# Altium PCB PUMP_MODULE_20230110.PcbDoc (part 1 of 6)
Units mm, origin at the board's own origin, x right, y up, seen from the top; angles counter-clockwise.
Board outline 260.15 x 142.01 mm, 4 copper layers (Top Layer, Mid-Layer 1, Mid-Layer 2, Bottom Layer); 422 components, 240 nets, 1746 pads, 416 vias.
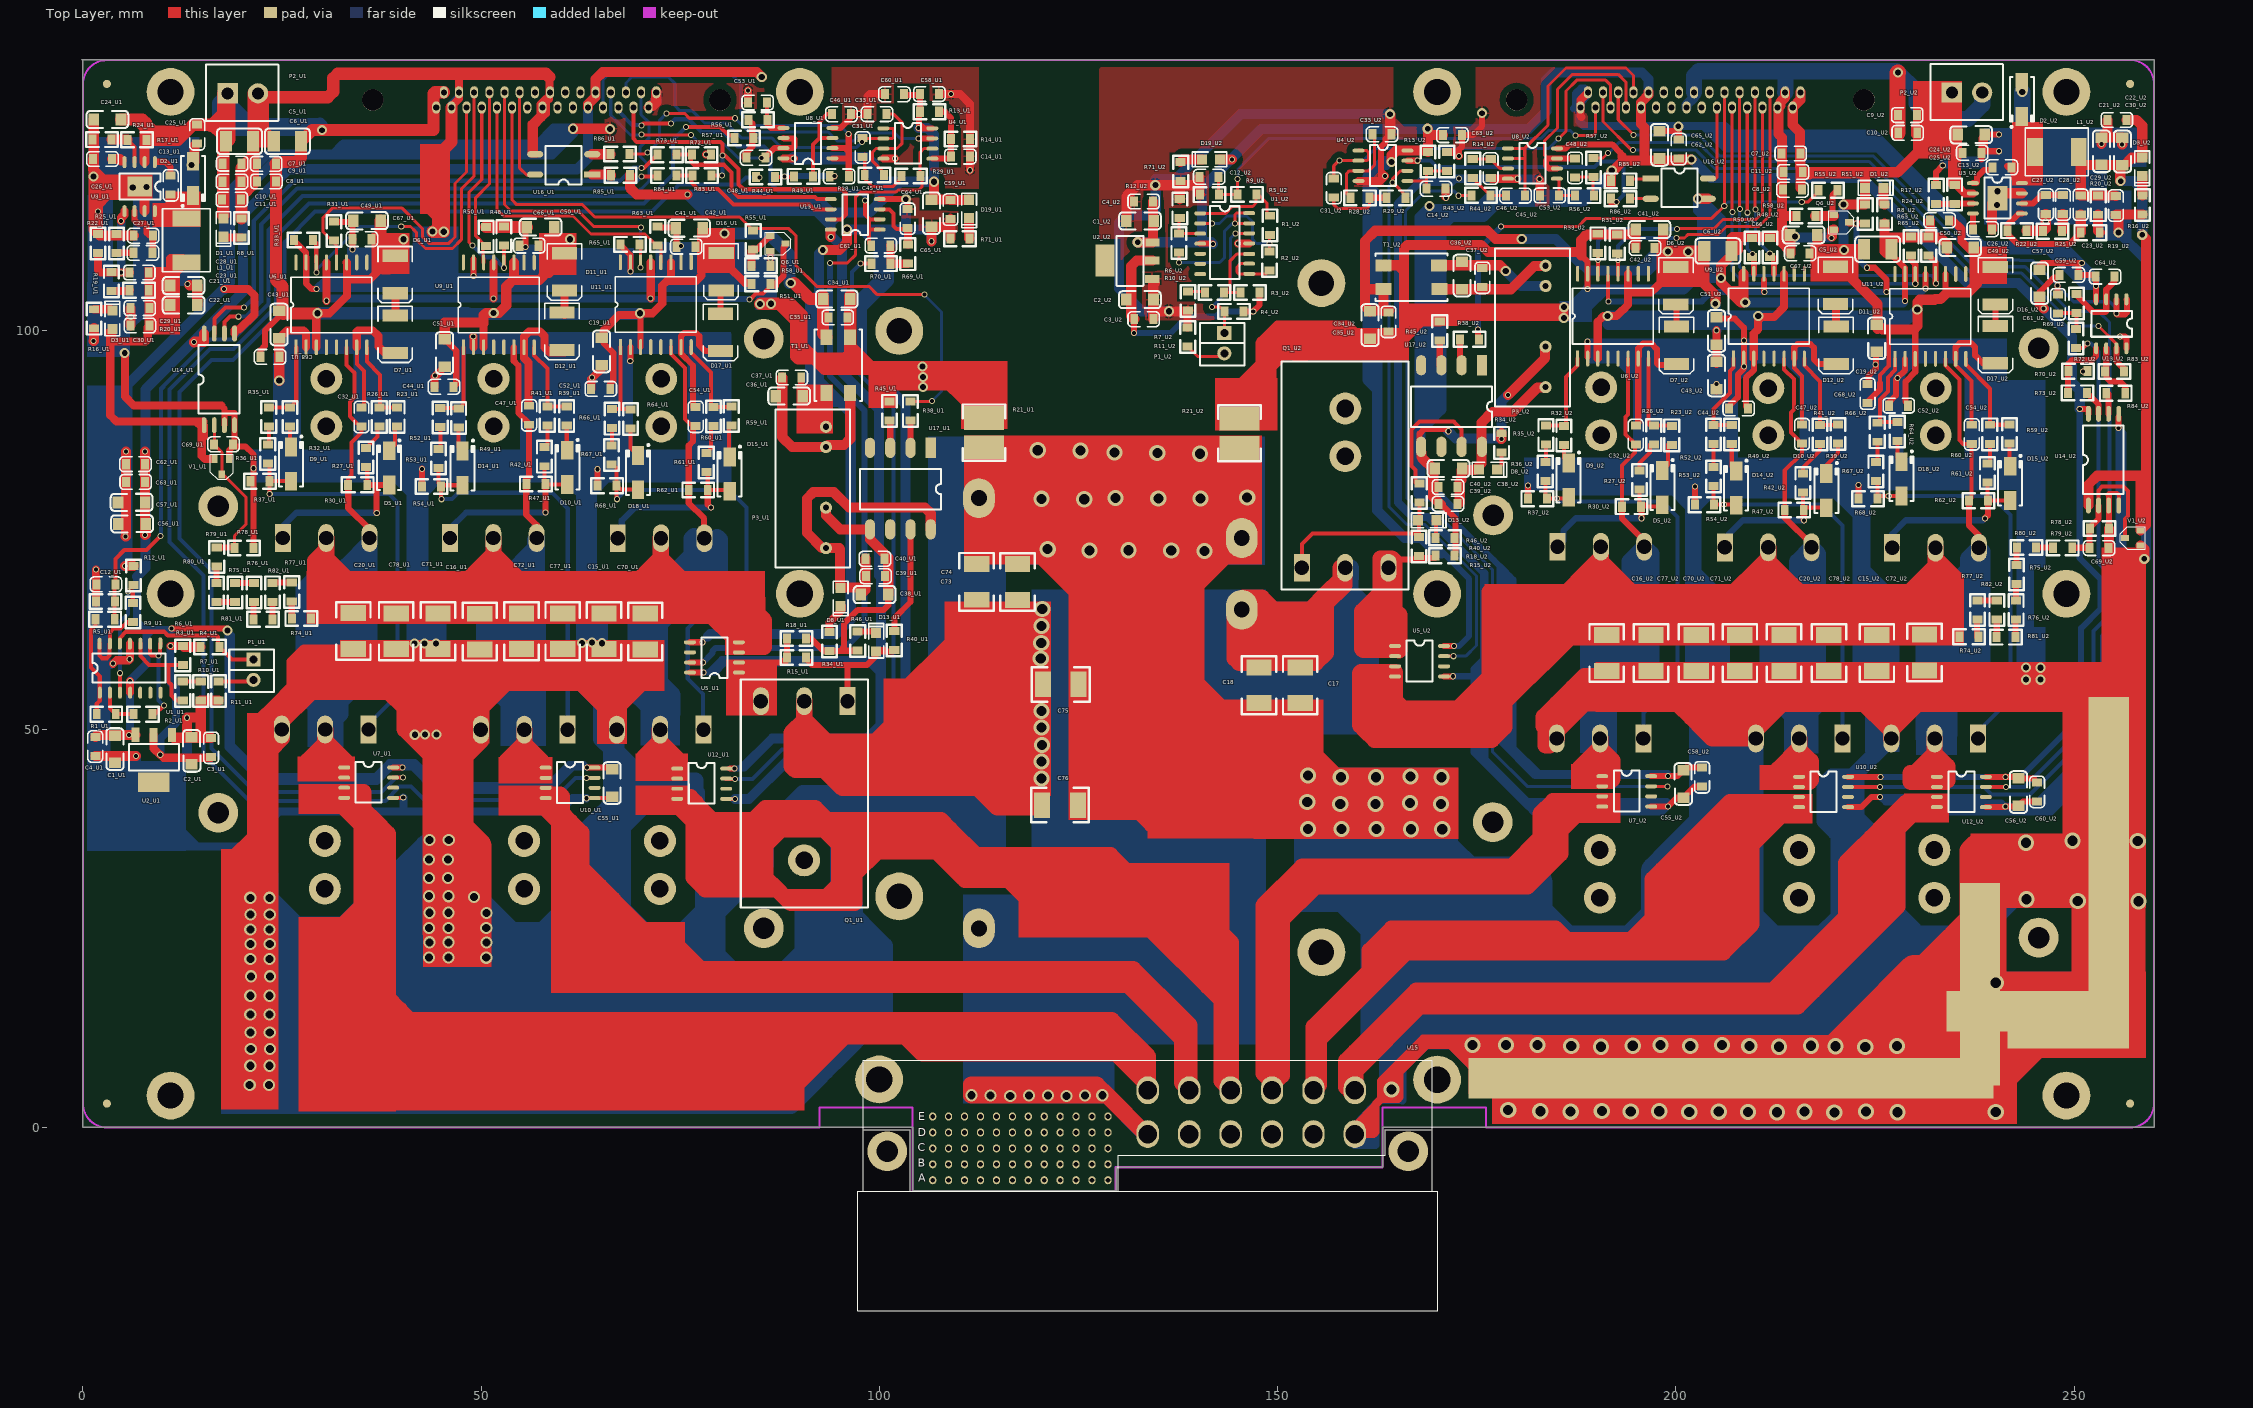
[diagram p0: Top Layer view]
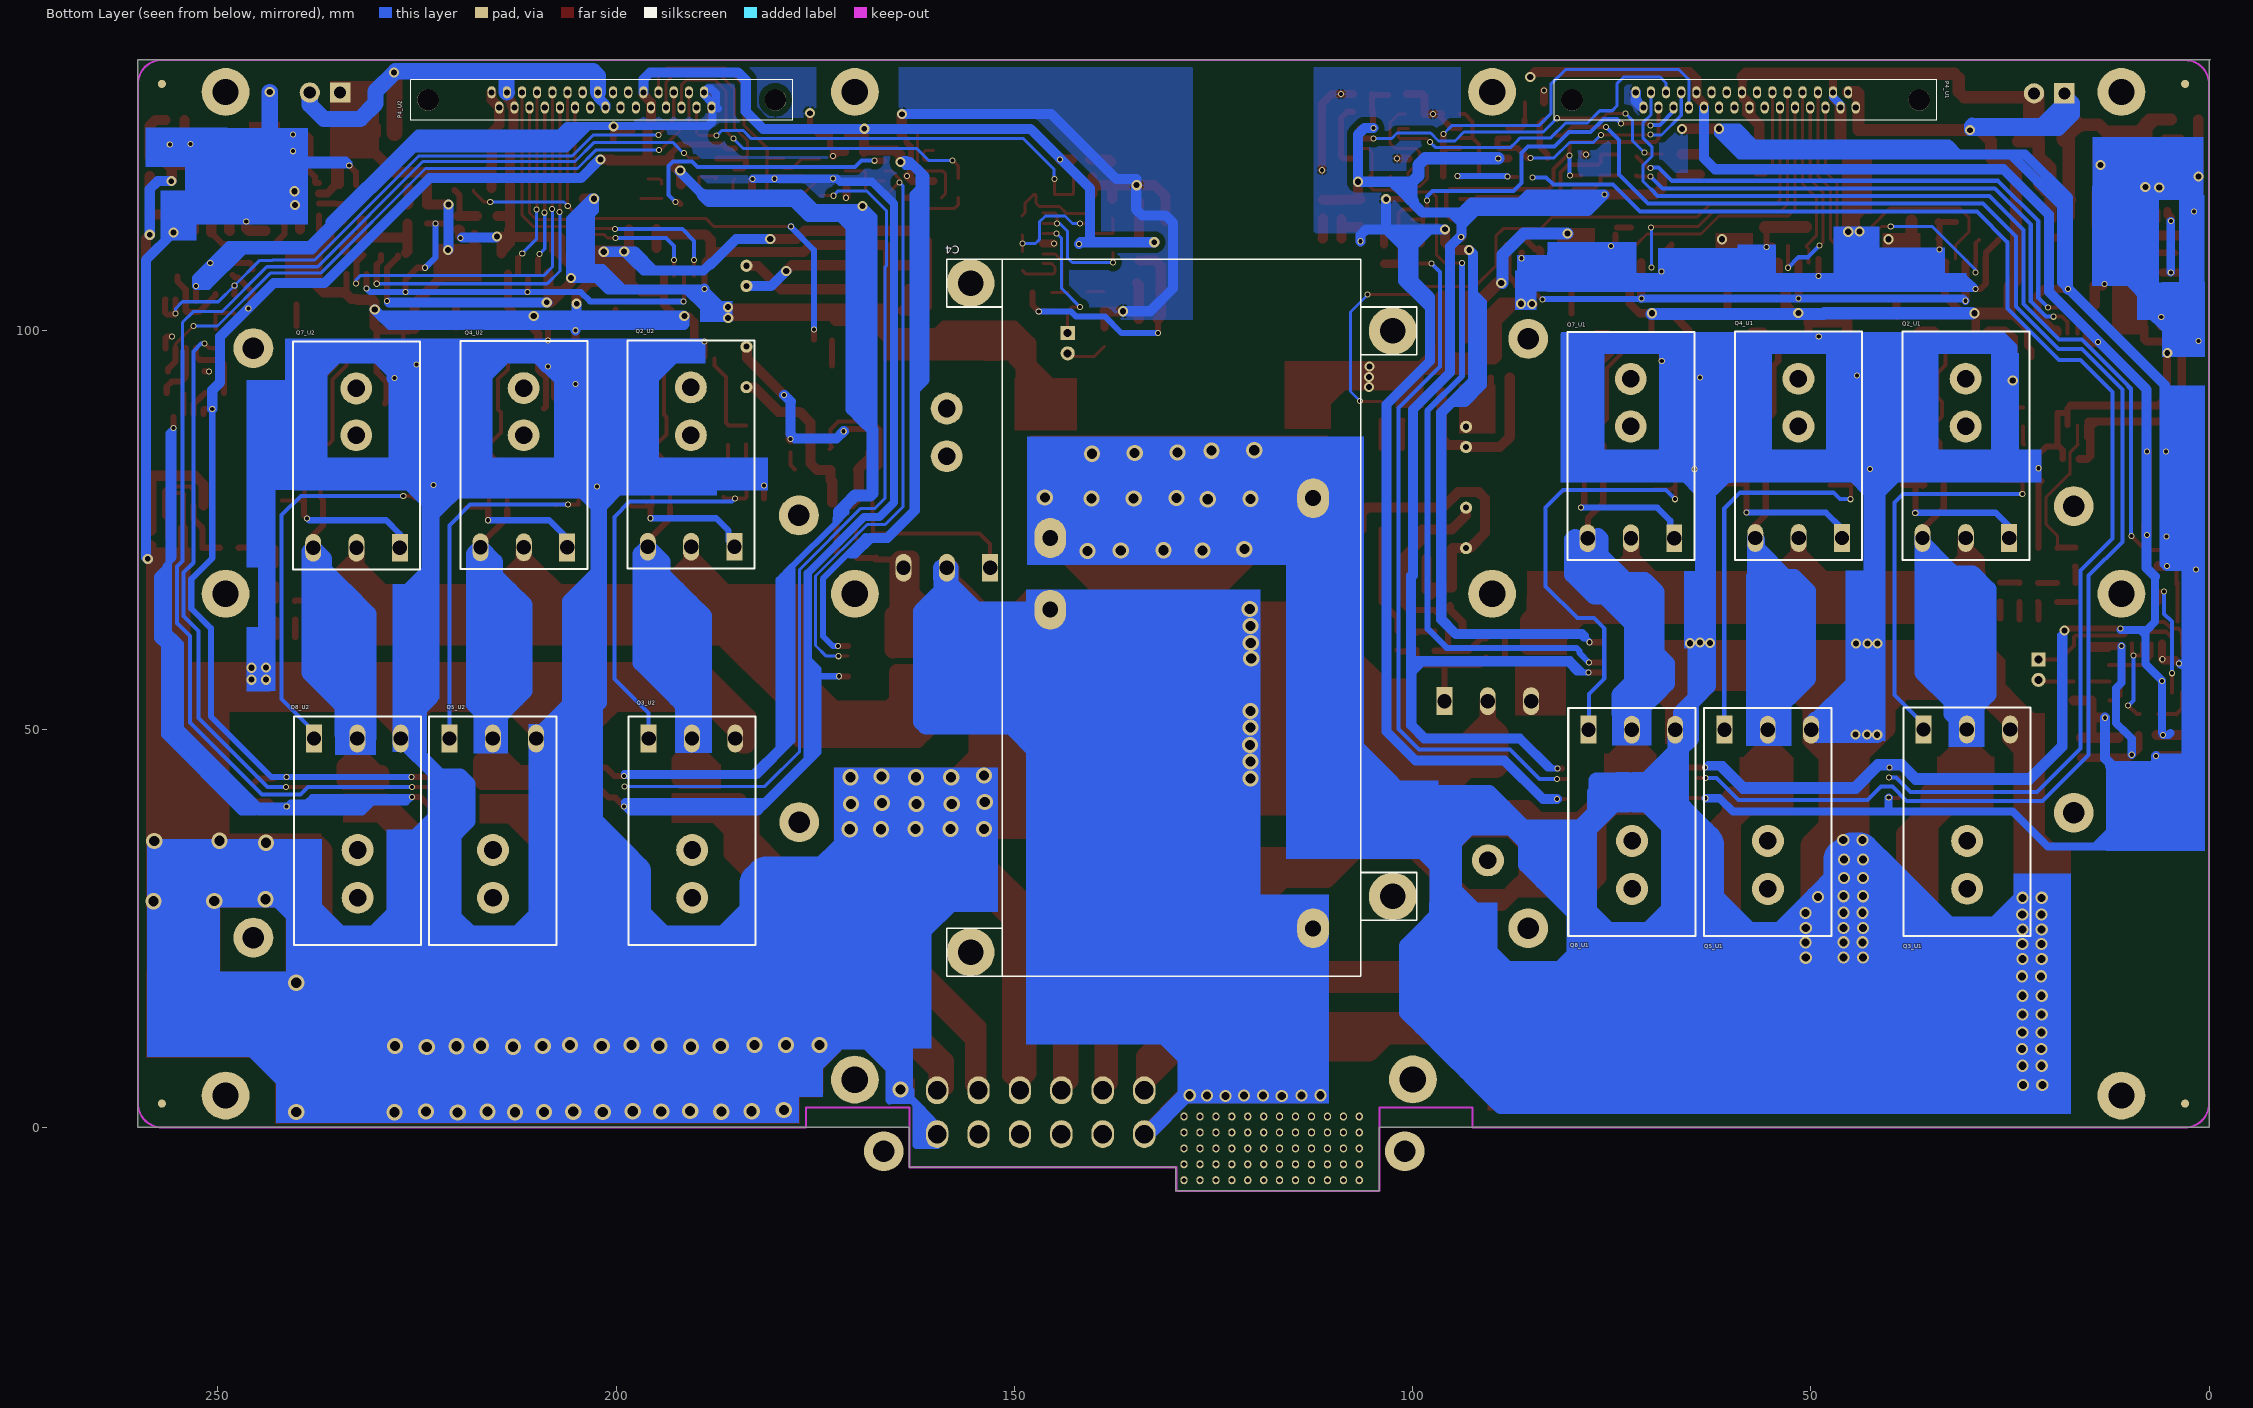
[diagram p1: Bottom Layer view, seen from below]
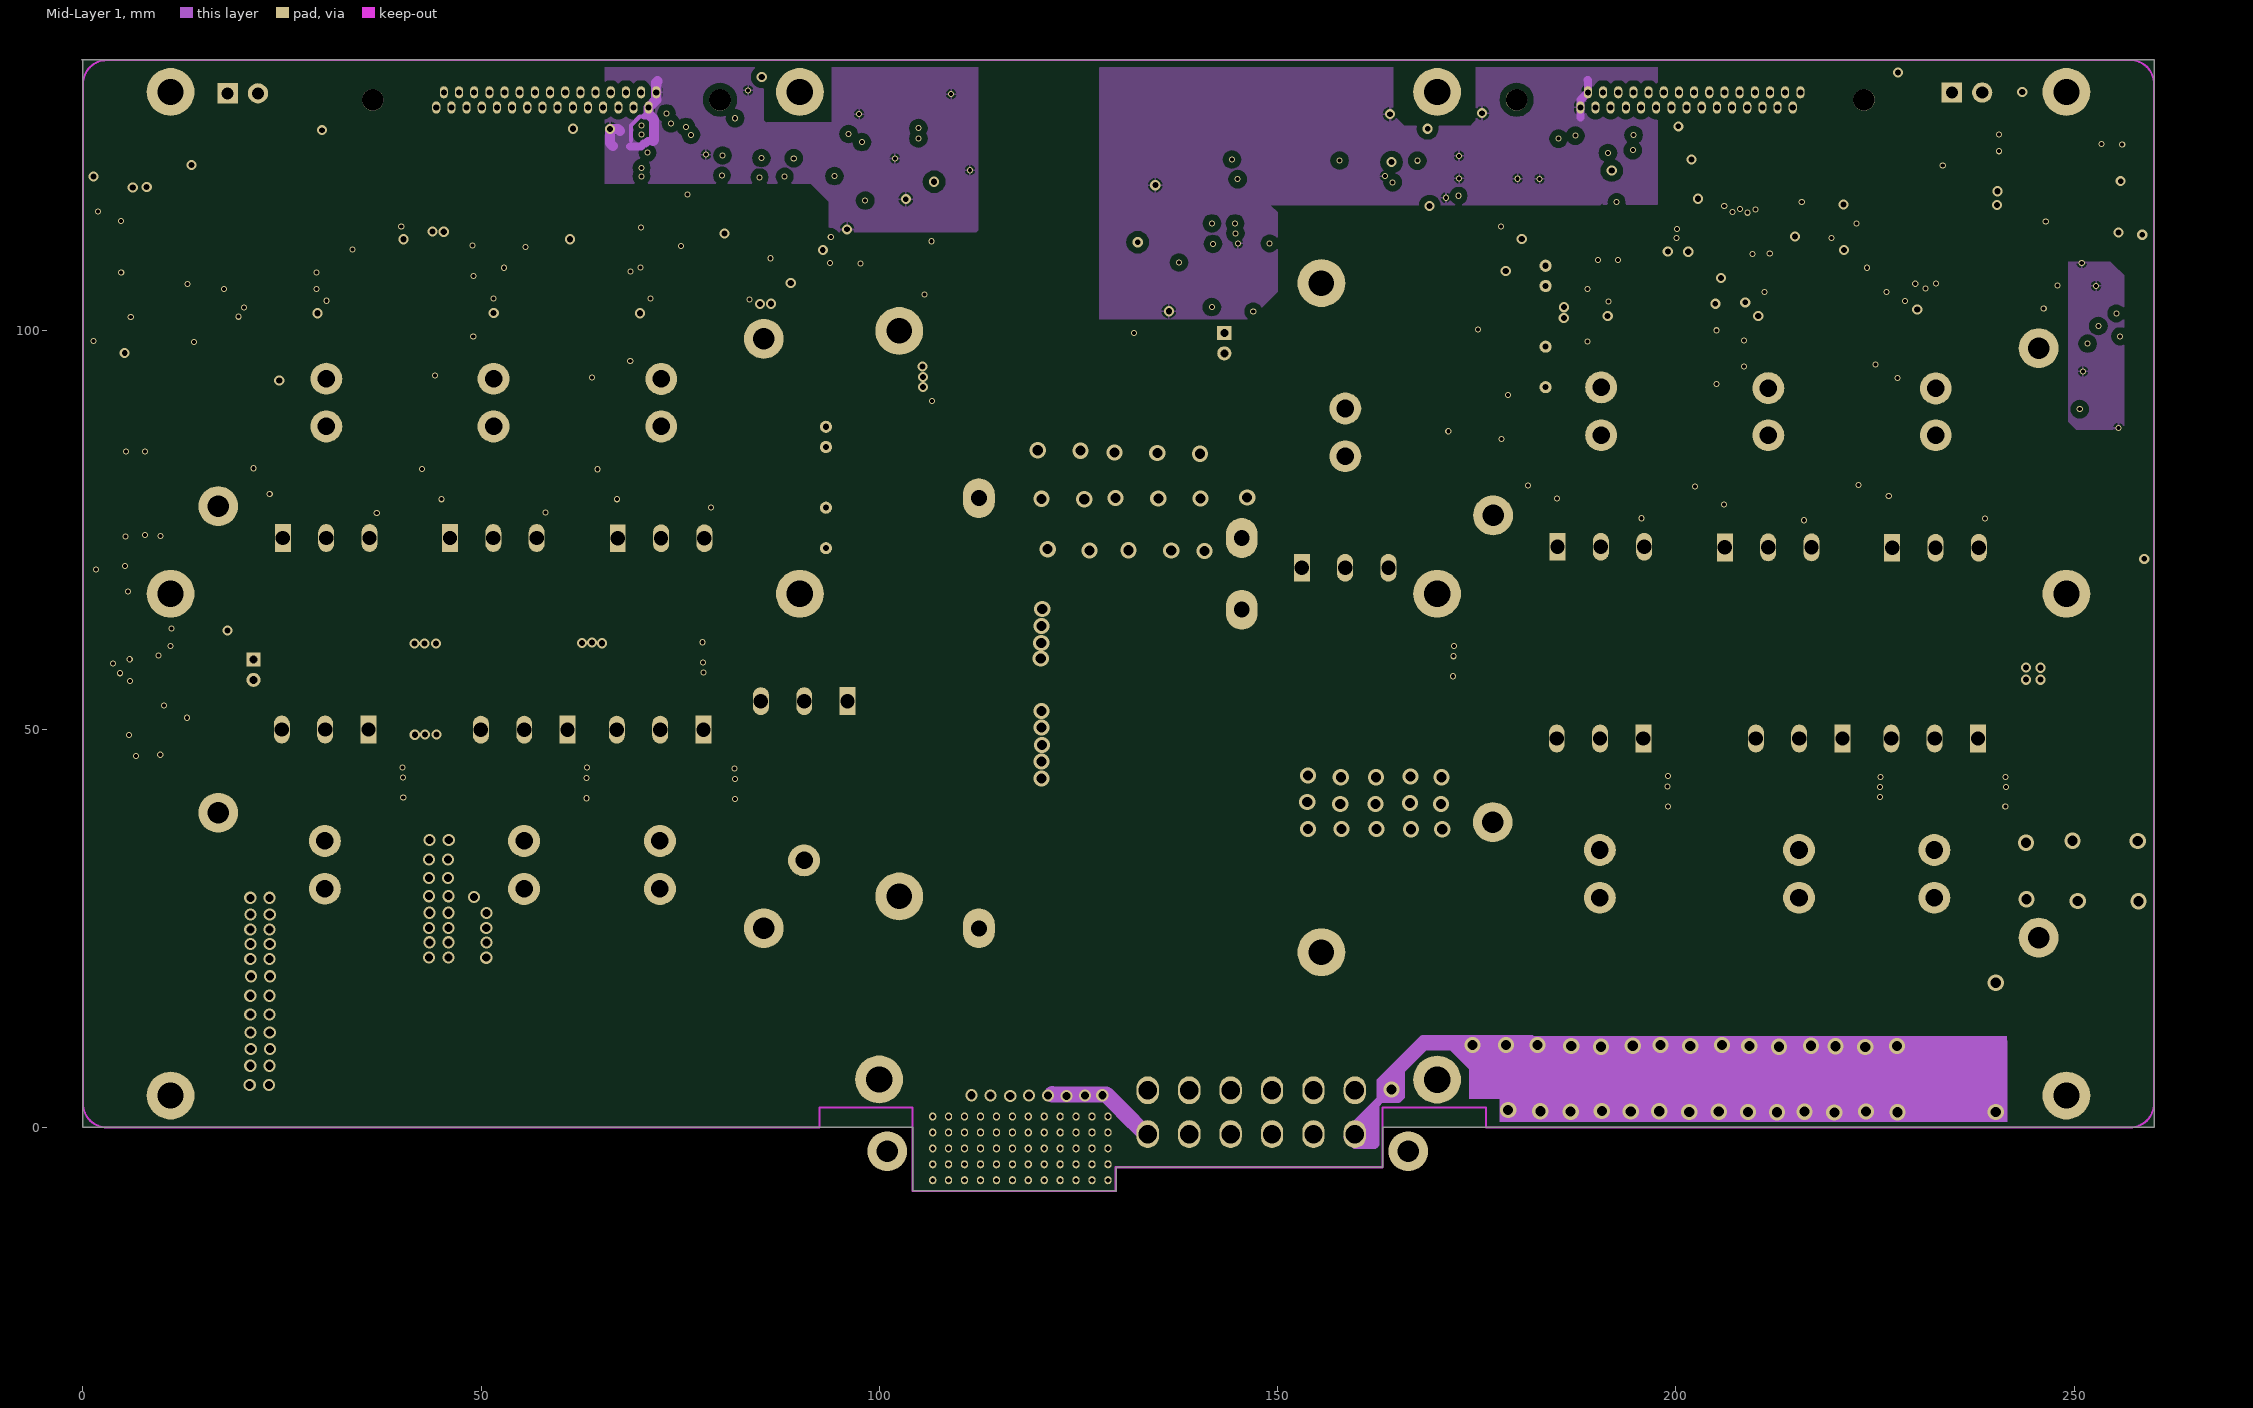
[diagram p2: Mid-Layer 1]
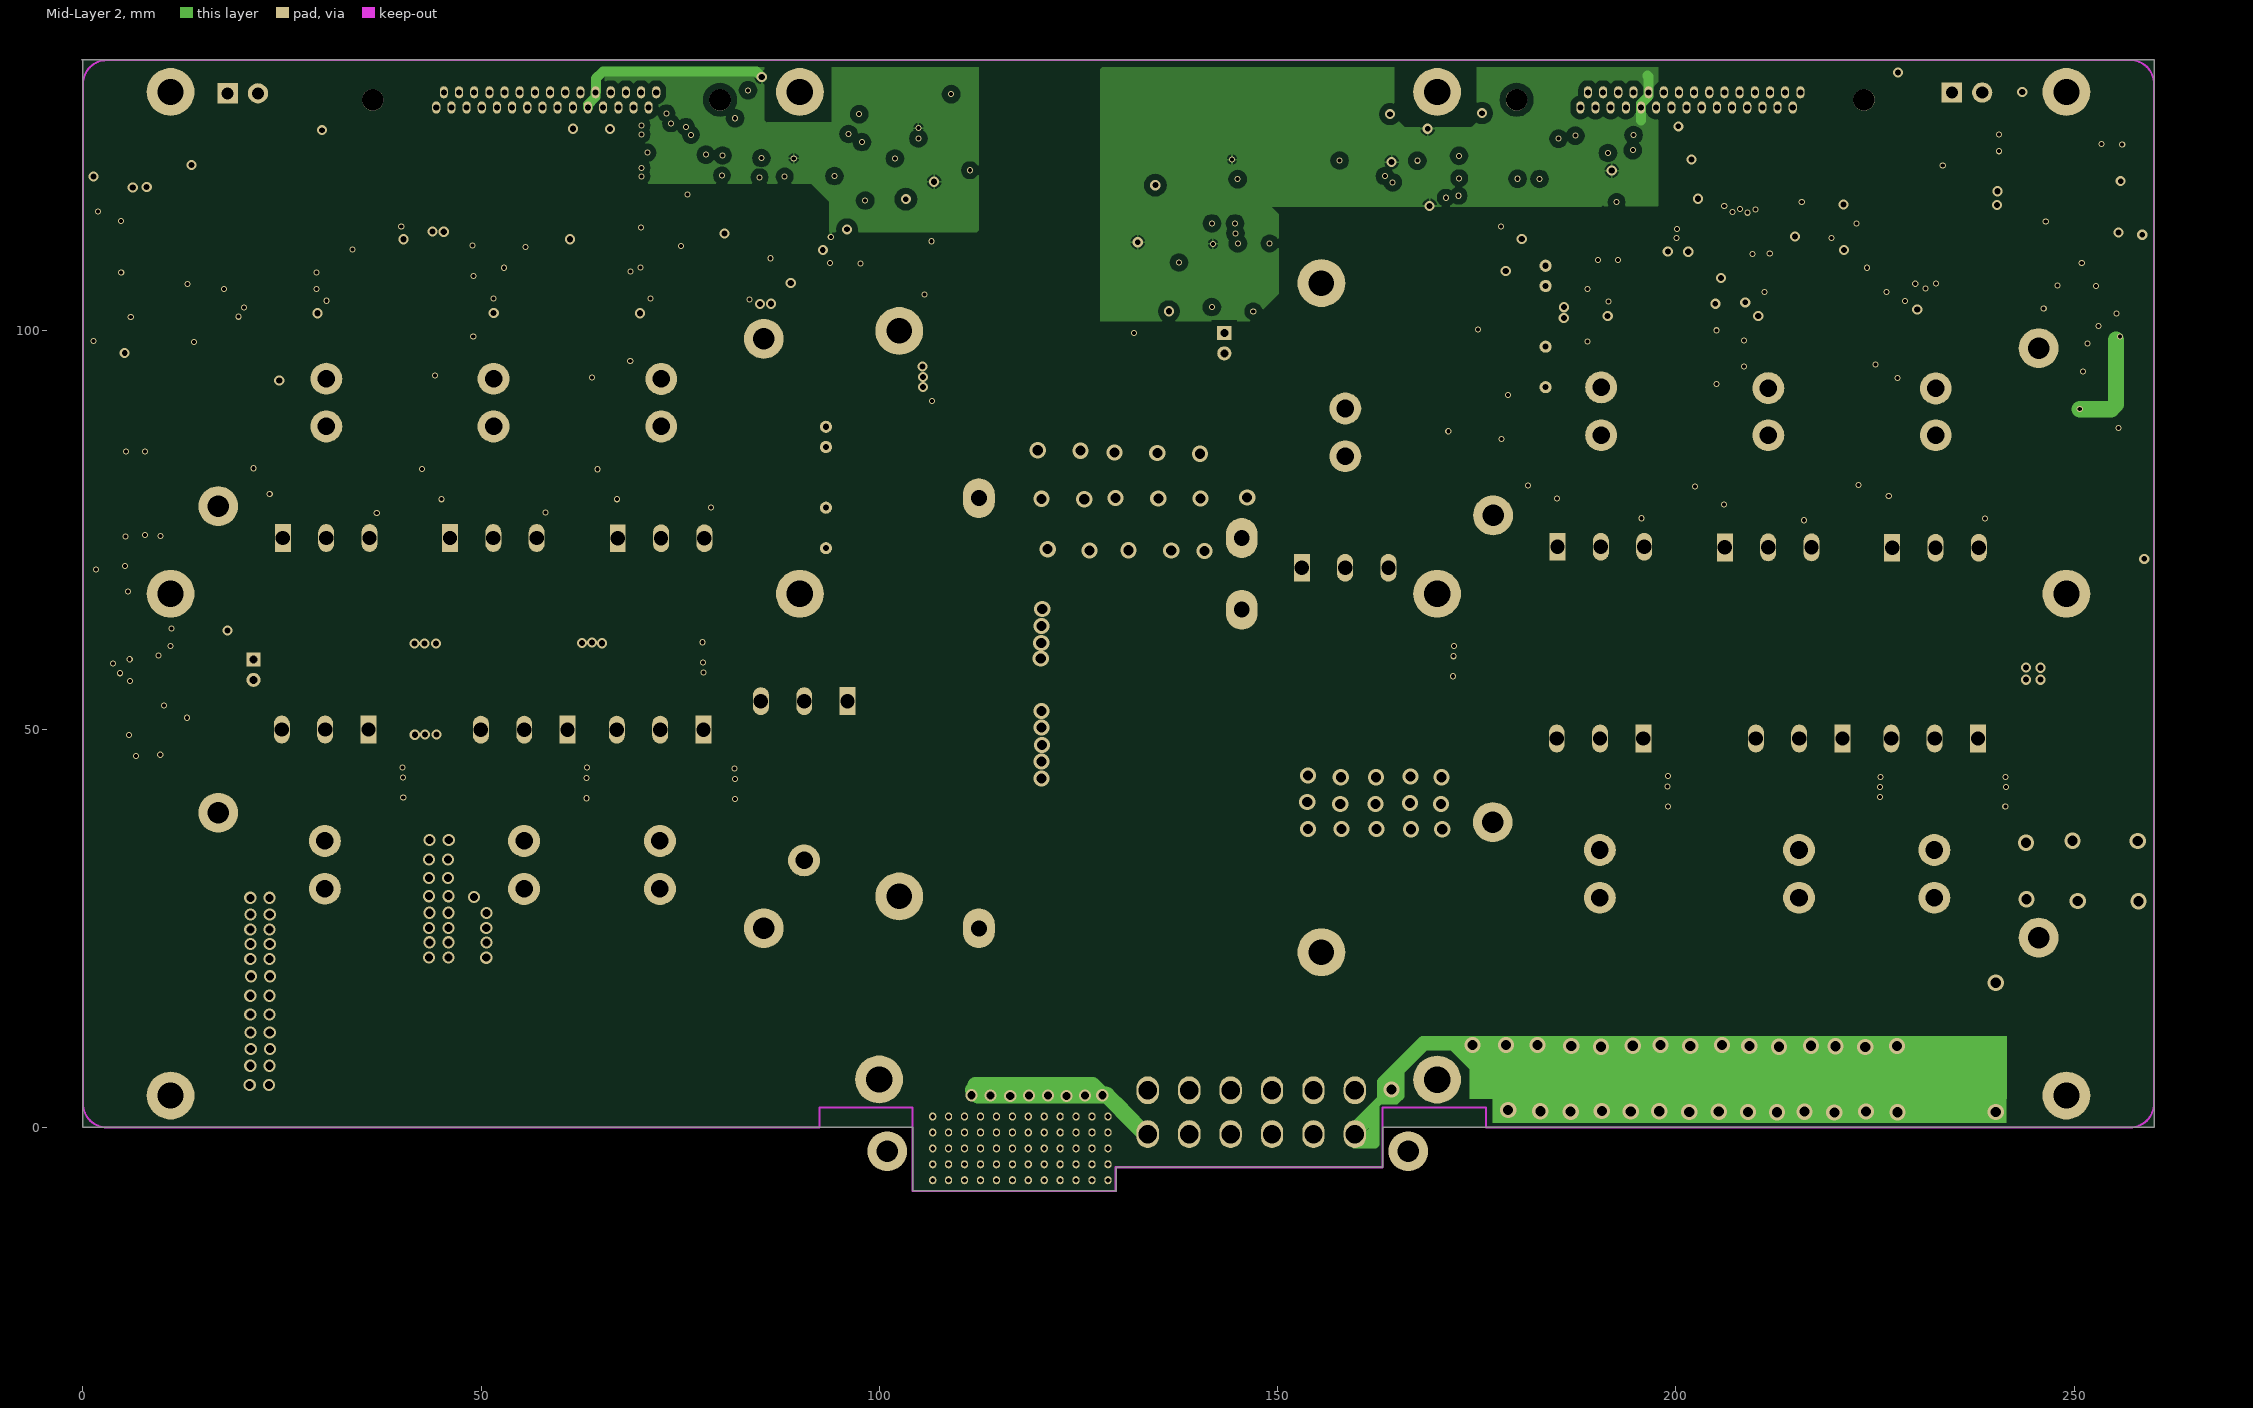
[diagram p3: Mid-Layer 2]

## Layer stack, top to bottom
Top Layer: signal copper 0.0356
Dielectric: core 0.32, FR-4, Dk 4.8
Mid-Layer 1: signal copper 0.0356
Dielectric: prepreg 0.32, FR-4, Dk 4.8
Mid-Layer 2: signal copper 0.0356
Dielectric: core 0.32, FR-4, Dk 4.8
Bottom Layer: signal copper 0.0356

## Board outline
0,134.01 0.025,133.985 0.025,0 104.225,0 104.225,-7.925 129.649,-7.925 129.725,-8.001 129.725,-5 163.225,-5 163.225,0 260.045,0 260.045,134.01 -0.102,134.01

## Design rules (kind name [scope] priority, off if disabled: settings)
Clearance Clearance_1 [InPolygon] p1: gap=0.762
Clearance [All] p2: gap=0.254
HoleSize [All] p1: absolutevalues=TRUE maxlimit=12.7 minlimit=0.025 maxpercent=80.000 minpercent=20.000
MinimumSolderMaskSliver [All] p1: minsoldermaskwidth=0
PolygonConnect [All] p1: connectstyle=Relief reliefconductorwidth=0.254 reliefentries=4 polygonreliefangle="90 Angle" airgapwidth=0.254
RoutingVias [All] p1: holewidth=0.711 width=1.27 viastyle="Through Hole" minholewidth=0.508 minwidth=0.762 maxholewidth=0.711 maxwidth=1.27
SilkToSilkClearance [All] p1: silktosilkclearance=0
SilkToSolderMaskClearance [IsPad] p1: minsilkscreentomaskgap=0 clearancetoexposedcopper=TRUE
SolderMaskExpansion [All] p1: expansion=0.102
Width [All] p1: maxlimit=5.08 minlimit=0.254 preferedwidth=0.254 minimp=50.000000 maximp=50.000000 favimp=50.000000
24 further rules are at their usual default settings.

## Classes and differential pairs
channel class PUMP_THREEPHASE_MODULE: U1 U2
component class U3: C4 C17 C18 C73 C74 C75 C76 U15
component class U2: C1_U2 C2_U2 C3_U2 C4_U2 C5_U2 C6_U2 C7_U2 C8_U2 C9_U2 C10_U2 C11_U2 C12_U2 C13_U2 C14_U2 C15_U2 C16_U2 C19_U2 C20_U2 C21_U2 C22_U2 C23_U2 C24_U2 C25_U2 C26_U2 C27_U2 C28_U2 C29_U2 C30_U2 C31_U2 C32_U2 C33_U2 C34_U2 C35_U2 C36_U2 C37_U2 C38_U2 C39_U2 C40_U2 C41_U2 C42_U2 C43_U2 C44_U2 C45_U2 C46_U2 C47_U2 C48_U2 C49_U2 C50_U2 C51_U2 C52_U2 C53_U2 C54_U2 C55_U2 C56_U2 C57_U2 C58_U2 C59_U2 C60_U2 C61_U2 C62_U2 C63_U2 C64_U2 C65_U2 C66_U2 C67_U2 C68_U2 C69_U2 C70_U2 C71_U2 C72_U2 C77_U2 C78_U2 D1_U2 D2_U2 D3_U2 D5_U2 D6_U2 D7_U2 D8_U2 D9_U2 D10_U2 D11_U2 D12_U2 D13_U2 D14_U2 D15_U2 D16_U2 D17_U2 D18_U2 D19_U2 L1_U2 P1_U2 P2_U2 P3_U2 P4_U2 Q1_U2 Q2_U2 Q3_U2 Q4_U2 Q5_U2 Q6_U2 Q7_U2 Q8_U2 R1_U2 R2_U2 R3_U2 R4_U2 R5_U2 R6_U2 R7_U2 R8_U2 R9_U2 R10_U2 R11_U2 R12_U2 R13_U2 R14_U2 R15_U2 R16_U2 R17_U2 R18_U2 R19_U2 R20_U2 R21_U2 R22_U2 R23_U2 R24_U2 R25_U2 R26_U2 R27_U2 R28_U2 R29_U2 R30_U2 R31_U2 R32_U2 R33_U2 R34_U2 R35_U2 R36_U2 R37_U2 R38_U2 R39_U2 R40_U2 R41_U2 R42_U2 R43_U2 R44_U2 R45_U2 R46_U2 R47_U2 R48_U2 R49_U2 R50_U2 R51_U2 R52_U2 R53_U2 R54_U2 R55_U2 R56_U2 R57_U2 R58_U2 R59_U2 R60_U2 R61_U2 R62_U2 R63_U2 R64_U2 R65_U2 R66_U2 R67_U2 R68_U2 R69_U2 R70_U2 R71_U2 R72_U2 R73_U2 R74_U2 R75_U2 R76_U2 R77_U2 R78_U2 R79_U2 R80_U2 R81_U2 R82_U2 R83_U2 R84_U2 R85_U2 R86_U2 T1_U2 U1_U2 U2_U2 U3_U2 U4_U2 U5_U2 U6_U2 U7_U2 U8_U2 U9_U2 U10_U2 U11_U2 U12_U2 U13_U2 U14_U2 U16_U2 U17_U2 V1_U2
component class U1: C1_U1 C2_U1 C3_U1 C4_U1 C5_U1 C6_U1 C7_U1 C8_U1 C9_U1 C10_U1 C11_U1 C12_U1 C13_U1 C14_U1 C15_U1 C16_U1 C19_U1 C20_U1 C21_U1 C22_U1 C23_U1 C24_U1 C25_U1 C26_U1 C27_U1 C28_U1 C29_U1 C30_U1 C31_U1 C32_U1 C33_U1 C34_U1 C35_U1 C36_U1 C37_U1 C38_U1 C39_U1 C40_U1 C41_U1 C42_U1 C43_U1 C44_U1 C45_U1 C46_U1 C47_U1 C48_U1 C49_U1 C50_U1 C51_U1 C52_U1 C53_U1 C54_U1 C55_U1 C56_U1 C57_U1 C58_U1 C59_U1 C60_U1 C61_U1 C62_U1 C63_U1 C64_U1 C65_U1 C66_U1 C67_U1 C68_U1 C69_U1 C70_U1 C71_U1 C72_U1 C77_U1 C78_U1 D1_U1 D2_U1 D3_U1 D5_U1 D6_U1 D7_U1 D8_U1 D9_U1 D10_U1 D11_U1 D12_U1 D13_U1 D14_U1 D15_U1 D16_U1 D17_U1 D18_U1 D19_U1 L1_U1 P1_U1 P2_U1 P3_U1 P4_U1 Q1_U1 Q2_U1 Q3_U1 Q4_U1 Q5_U1 Q6_U1 Q7_U1 Q8_U1 R1_U1 R2_U1 R3_U1 R4_U1 R5_U1 R6_U1 R7_U1 R8_U1 R9_U1 R10_U1 R11_U1 R12_U1 R13_U1 R14_U1 R15_U1 R16_U1 R17_U1 R18_U1 R19_U1 R20_U1 R21_U1 R22_U1 R23_U1 R24_U1 R25_U1 R26_U1 R27_U1 R28_U1 R29_U1 R30_U1 R31_U1 R32_U1 R33_U1 R34_U1 R35_U1 R36_U1 R37_U1 R38_U1 R39_U1 R40_U1 R41_U1 R42_U1 R43_U1 R44_U1 R45_U1 R46_U1 R47_U1 R48_U1 R49_U1 R50_U1 R51_U1 R52_U1 R53_U1 R54_U1 R55_U1 R56_U1 R57_U1 R58_U1 R59_U1 R60_U1 R61_U1 R62_U1 R63_U1 R64_U1 R65_U1 R66_U1 R67_U1 R68_U1 R69_U1 R70_U1 R71_U1 R72_U1 R73_U1 R74_U1 R75_U1 R76_U1 R77_U1 R78_U1 R79_U1 R80_U1 R81_U1 R82_U1 R83_U1 R84_U1 R85_U1 R86_U1 T1_U1 U1_U1 U2_U1 U3_U1 U4_U1 U5_U1 U6_U1 U7_U1 U8_U1 U9_U1 U10_U1 U11_U1 U12_U1 U13_U1 U14_U1 U16_U1 U17_U1 V1_U1

## Components (designator, comment, footprint, x,y, rotation, side; value= is the part's Value field where it differs from the comment)
C1_U1 "22uF/25V" WP_1206CC 4.064,49.2 r270 top (schematic designator C1)
C1_U2 "22uF/25V" WP_1206CC 134.442,113.792 r180 top (schematic designator C1)
C2_U1 "22uF/25V" WP_1206CC 13.665,45.568 r90 top (schematic designator C2)
C2_U2 "22uF/25V" WP_1206CC 130.988,103.937 r0 top (schematic designator C2)
C3_U1 "0.1uF/50V" WP_0805C 16.078,46.457 r90 top (schematic designator C3)
C3_U2 "0.1uF/50V" WP_0805C 131.978,101.498 r0 top (schematic designator C3)
C4 "150uF/450V" MKP3D-450V-140UF-1 106.5,19 r90 bottom locked
C4_U1 "0.1uF/50V" WP_0805C 1.6,49.022 r270 top (schematic designator C4)
C4_U2 "0.1uF/50V" WP_0805C 134.391,116.205 r180 top (schematic designator C4)
C5_U1 "47uF/50V" WP_1210CC 27.407,123.8 r180 top (schematic designator C5)
C5_U2 "47uF/50V" WP_1210CC 223.622,110.261 r0 top (schematic designator C5)
C6_U1 "47uF/50V" WP_1210CC 17.958,123.8 r0 top (schematic designator C6)
C6_U2 "47uF/50V" WP_1210CC 203.556,110.033 r0 top (schematic designator C6)
C7_U1 "0.1uF/50V" WP_0805C 19.964,120.955 r180 top (schematic designator C7)
C7_U2 "0.1uF/50V" WP_0805C 213.208,122.301 r0 top (schematic designator C7)
C8_U1 "0.1uF/50V" WP_0805C 21.844,118.796 r0 top (schematic designator C8)
C8_U2 "0.1uF/50V" WP_0805C 213.436,117.754 r0 top (schematic designator C8)
C9_U1 "0.1uF/50V" WP_0805C 21.819,121.006 r0 top (schematic designator C9)
C9_U2 "0.1uF/50V" WP_0805C 227.838,127.127 r0 top (schematic designator C9)
C10_U1 "0.1uF/50V" WP_0805C 19.914,116.459 r180 top (schematic designator C10)
C10_U2 "0.1uF/50V" WP_0805C 227.889,124.892 r0 top (schematic designator C10)
C11_U1 "0.1uF/50V" WP_0805C 19.939,118.694 r180 top (schematic designator C11)
C11_U2 "0.1uF/50V" WP_0805C 213.512,119.99 r0 top (schematic designator C11)
C12_U1 "0.1uF/50V" WP_0805C 4.115,68.148 r180 top (schematic designator C12)
C12_U2 "0.1uF/50V" WP_0805C 142.621,119.304 r180 top (schematic designator C12)
C13_U1 "0.1uF/50V" WP_0805C 10.998,117.069 r90 top (schematic designator C13)
C13_U2 "0.1uF/50V" WP_0805C 242.138,120.498 r180 top (schematic designator C13)
C14_U1 "0.1uF/50V" WP_0805C 108.966,121.92 r0 top (schematic designator C14)
C14_U2 "0.1uF/50V" WP_0805C 168.681,117.881 r0 top (schematic designator C14)
C15_U1 "0.1uF/630V" WP_1812 65.43,60.198 r90 top (schematic designator C15)
C15_U2 "0.1uF/630V" WP_1812 225.222,57.48 r90 top (schematic designator C15)
C16_U1 "0.1uF/630V" WP_1812 49.835,60.147 r90 top (schematic designator C16)
C16_U2 "0.1uF/630V" WP_1812 191.313,57.455 r90 top (schematic designator C16)
C17 "0.1uF/630V" WP_1812 152.832,53.416 r90 top
C18 "0.1uF/630V" WP_1812 147.65,53.416 r90 top
C19_U1 "10uF/50V" WP_1206CC 65.151,99.136 r270 top (schematic designator C19)
C19_U2 "10uF/50V" WP_1206CC 225.222,100.787 r270 top (schematic designator C19)
C20_U1 "0.1uF/630V" WP_1812 33.96,60.223 r90 top (schematic designator C20)
C20_U2 "0.1uF/630V" WP_1812 213.563,57.48 r90 top (schematic designator C20)
C21_U1 "22uF/25V" WP_1206CC 10.947,105.715 r0 top (schematic designator C21)
C21_U2 "22uF/25V" WP_1206CC 253.416,120.828 r90 top (schematic designator C21)
C22_U1 "22uF/25V" WP_1206CC 10.947,103.251 r0 top (schematic designator C22)
C22_U2 "22uF/25V" WP_1206CC 256.032,120.802 r90 top (schematic designator C22)
C23_U1 "100pF/50V" WP_0805C 8.306,107.29 r180 top (schematic designator C23)
C23_U2 "100pF/50V" WP_0805C 250.85,117.043 r270 top (schematic designator C23)
C24_U1 "22uF/25V" WP_1206CC 4.801,126.517 r180 top (schematic designator C24)
C24_U2 "22uF/25V" WP_1206CC 235.356,124.638 r0 top (schematic designator C24)
C25_U1 "0.1uF/50V" WP_0805C 14.326,123.469 r90 top (schematic designator C25)
C25_U2 "0.1uF/50V" WP_0805C 238.404,122.326 r180 top (schematic designator C25)
C26_U1 "0.01uF/50V" WP_0805C 1.27,121.615 r0 top (schematic designator C26)
C26_U2 "0.01uF/50V" WP_0805C 239.725,112.725 r180 top (schematic designator C26)
C27_U1 "22pF/50V" WP_0805C 6.375,111.989 r0 top (schematic designator C27)
C27_U2 "22pF/50V" WP_0805C 246.405,114.656 r90 top (schematic designator C27)
C28_U1 "2.2nF/50V" WP_0805C 6.35,109.83 r0 top (schematic designator C28)
C28_U2 "2.2nF/50V" WP_0805C 248.539,114.656 r90 top (schematic designator C28)
C29_U1 "0.1uF/50V" WP_0805C 5.944,102.895 r0 top (schematic designator C29)
C29_U2 "0.1uF/50V" WP_0805C 255.194,114.529 r90 top (schematic designator C29)
C30_U1 "0.1uF/50V" WP_0805C 5.969,100.711 r0 top (schematic designator C30)
C30_U2 "0.1uF/50V" WP_0805C 254.152,126.517 r0 top (schematic designator C30)
C31_U1 "10nF/50V" WP_0805C 97.866,121.818 r90 top (schematic designator C31)
C31_U2 "10nF/50V" WP_0805C 157.023,116.713 r90 top (schematic designator C31)
C32_U1 "1uF/50V" WP_0805C 35.027,90.399 r270 top (schematic designator C32)
C32_U2 "1uF/50V" WP_0805C 194.996,88.138 r270 top (schematic designator C32)
C33_U1 "3.3nF/50V" WP_0805C 100.914,127.178 r180 top (schematic designator C33)
C33_U2 "3.3nF/50V" WP_0805C 161.9,124.714 r0 top (schematic designator C33)
C34_U1 "" WP_1206CC 92.939,104.013 r0 top (schematic designator C34)
C34_U2 "" WP_1206CC 161.62,102.438 r270 top (schematic designator C34)
C35_U1 "" WP_0805C 93.574,101.727 r0 top (schematic designator C35)
C35_U2 "" WP_0805C 163.957,102.337 r270 top (schematic designator C35)
C36_U1 "22uF/25V" WP_1206CC 90.399,91.796 r180 top (schematic designator C36)
C36_U2 "22uF/25V" WP_1206CC 173.152,105.232 r90 top (schematic designator C36)
C37_U1 "" WP_0805C 90.221,94.107 r180 top (schematic designator C37)
C37_U2 "" WP_0805C 175.666,105.461 r90 top (schematic designator C37)
C38_U1 "22uF/25V" WP_1206CC 97.688,66.904 r0 top (schematic designator C38)
C38_U2 "22uF/25V" WP_1206CC 173.177,82.702 r180 top (schematic designator C38)
C39_U1 "" WP_0805C 98.323,69.24 r0 top (schematic designator C39)
C39_U2 "" WP_0805C 172.593,78.257 r180 top (schematic designator C39)
C40_U1 "" WP_0805C 98.247,71.425 r0 top (schematic designator C40)
C40_U2 "" WP_0805C 172.593,80.366 r180 top (schematic designator C40)
C41_U1 "10uF/50V" WP_1206CC 77.851,112.878 r180 top (schematic designator C41)
C41_U2 "10uF/50V" WP_1206CC 198.399,112.725 r180 top (schematic designator C41)
C42_U1 "0.1uF/50V" WP_0805C 76.962,110.541 r180 top (schematic designator C42)
C42_U2 "0.1uF/50V" WP_0805C 197.333,110.363 r180 top (schematic designator C42)
C43_U1 "10uF/50V" WP_1206CC 24.663,102.514 r270 top (schematic designator C43)
C43_U2 "10uF/50V" WP_1206CC 205.105,96.114 r270 top (schematic designator C43)
C44_U1 "0.1uF/50V" WP_0805C 46.558,92.939 r180 top (schematic designator C44)
C44_U2 "0.1uF/50V" WP_0805C 209.093,90.221 r180 top (schematic designator C44)
C45_U1 "10nF/50V" WP_0805C 93.751,119.431 r0 top (schematic designator C45)
C45_U2 "10nF/50V" WP_0805C 178.664,117.018 r0 top (schematic designator C45)
C46_U1 "3.3nF/50V" WP_0805C 94.031,127.229 r0 top (schematic designator C46)
C46_U2 "3.3nF/50V" WP_0805C 176.784,121.59 r270 top (schematic designator C46)
C47_U1 "Cap Semi" WP_0805C 56.007,88.189 r90 top (schematic designator C47)
C47_U2 "Cap Semi" WP_0805C 215.798,85.827 r90 top (schematic designator C47)
C48_U1 "10nF/50V" WP_0805C 83.312,121.768 r0 top (schematic designator C48)
C48_U2 "10nF/50V" WP_0805C 187.3,119.253 r90 top (schematic designator C48)
C49_U1 "10uF/50V" WP_1206CC 37.389,113.817 r180 top (schematic designator C49)
C49_U2 "10uF/50V" WP_1206CC 237.414,110.465 r180 top (schematic designator C49)
C50_U1 "0.1uF/50V" WP_0805C 57.252,110.668 r180 top (schematic designator C50)
C50_U2 "0.1uF/50V" WP_0805C 234.315,113.843 r180 top (schematic designator C50)
C51_U1 "10uF/50V" WP_1206CC 45.441,98.933 r270 top (schematic designator C51)
C51_U2 "10uF/50V" WP_1206CC 205.08,98.273 r90 top (schematic designator C51)
C52_U1 "0.1uF/50V" WP_0805C 66.243,92.685 r180 top (schematic designator C52)
C52_U2 "0.1uF/50V" WP_0805C 229.184,90.576 r180 top (schematic designator C52)
C53_U1 "3.3nF/50V" WP_0805C 85.928,128.626 r180 top (schematic designator C53)
C53_U2 "3.3nF/50V" WP_0805C 185.369,116.967 r180 top (schematic designator C53)
C54_U1 "Cap Semi" WP_0805C 76.911,88.011 r90 top (schematic designator C54)
C54_U2 "Cap Semi" WP_0805C 237.109,85.801 r90 top (schematic designator C54)
C55_U1 "22uF/25V" WP_1206CC 66.472,44.958 r270 top (schematic designator C55)
C55_U2 "22uF/25V" WP_1206CC 200.939,44.831 r270 top (schematic designator C55)
C56_U1 "22uF/25V" WP_1206CC 7.899,75.768 r180 top (schematic designator C56)
C56_U2 "22uF/25V" WP_1206CC 243.027,43.815 r270 top (schematic designator C56)
C57_U1 "22uF/25V" WP_1206CC 7.849,78.461 r180 top (schematic designator C57)
C57_U2 "22uF/25V" WP_1206CC 245.643,104.267 r90 top (schematic designator C57)
C58_U1 "0.1uF/50V" WP_0805C 107.493,129.692 r180 top (schematic designator C58)
C58_U2 "0.1uF/50V" WP_0805C 203.251,42.748 r90 top (schematic designator C58)
C59_U1 "0.1uF/50V" WP_0805C 108.89,114.021 r90 top (schematic designator C59)
C59_U2 "0.1uF/50V" WP_0805C 250.546,106.985 r180 top (schematic designator C59)
C60_U1 "0.1uF/50V" WP_0805C 100.686,129.743 r0 top (schematic designator C60)
C60_U2 "0.1uF/50V" WP_0805C 245.313,40.919 r90 top (schematic designator C60)
C61_U1 "10nF/50V" WP_0805C 101.397,110.668 r180 top (schematic designator C61)
C61_U2 "10nF/50V" WP_0805C 247.929,102.133 r90 top (schematic designator C61)
C62_U1 "1uF/50V" WP_0805C 7.823,83.236 r180 top (schematic designator C62)
C62_U2 "1uF/50V" WP_0805C 200.33,121.615 r90 top (schematic designator C62)
C63_U1 "0.1uF/50V" WP_0805C 7.849,81.001 r180 top (schematic designator C63)
C63_U2 "0.1uF/50V" WP_0805C 170.739,124.612 r0 top (schematic designator C63)
C64_U1 "3.3nF/50V" WP_0805C 103.505,112.878 r90 top (schematic designator C64)
C64_U2 "3.3nF/50V" WP_0805C 255.092,106.782 r180 top (schematic designator C64)
C65_U1 "22uF/25V" WP_1206CC 106.553,116.484 r270 top (schematic designator C65)
C65_U2 "22uF/25V" WP_1206CC 197.942,121.641 r90 top (schematic designator C65)
C66_U1 "10uF/50V" WP_1206CC 59.182,113.005 r180 top (schematic designator C66)
C66_U2 "10uF/50V" WP_1206CC 217.754,112.039 r180 top (schematic designator C66)
C67_U1 "0.1uF/50V" WP_0805C 36.246,111.481 r180 top (schematic designator C67)
C67_U2 "0.1uF/50V" WP_0805C 216.814,109.703 r180 top (schematic designator C67)
C68_U1 "0.1uF/50V" WP_0805C 22.301,96.774 r0 top (schematic designator C68)
C68_U2 "0.1uF/50V" WP_0805C 224.028,90.907 r90 top (schematic designator C68)
C69_U1 "1nF/50V" WP_0805C 18.872,85.725 r180 top (schematic designator C69)
C69_U2 "1nF/50V" WP_0805C 254.33,72.695 r180 top (schematic designator C69)
C70_U1 "0.1uF/630V" WP_1812 70.612,60.173 r90 top (schematic designator C70)
C70_U2 "0.1uF/630V" WP_1812 202.54,57.455 r90 top (schematic designator C70)
C71_U1 "0.1uF/630V" WP_1812 44.602,60.198 r90 top (schematic designator C71)
C71_U2 "0.1uF/630V" WP_1812 208.026,57.455 r90 top (schematic designator C71)
C72_U1 "0.1uF/630V" WP_1812 55.067,60.198 r90 top (schematic designator C72)
C72_U2 "0.1uF/630V" WP_1812 231.216,57.531 r90 top (schematic designator C72)
C73 "0.1uF/630V" WP_1812 112.217,70.587 r270 top
C74 "0.1uF/630V" WP_1812 117.348,70.561 r270 top
C75 "0.1uF/630V" WP_1812 124.866,55.626 r180 top
C76 "0.1uF/630V" WP_1812 124.79,40.462 r180 top
C77_U1 "0.1uF/630V" WP_1812 60.249,60.198 r90 top (schematic designator C77)
C77_U2 "0.1uF/630V" WP_1812 196.875,57.455 r90 top (schematic designator C77)
C78_U1 "0.1uF/630V" WP_1812 39.345,60.198 r90 top (schematic designator C78)
C78_U2 "0.1uF/630V" WP_1812 219.202,57.455 r90 top (schematic designator C78)
D1_U1 "" WP_0805_LED 17.678,114.122 r270 top (schematic designator D1)
D1_U2 "" WP_0805_LED 223.749,117.958 r0 top (schematic designator D1)
D2_U1 "1N5822" WP_SMA_DO214AC 13.843,121.285 r270 top (schematic designator D2)
D2_U2 "1N5822" WP_SMA_DO214AC 243.434,131.216 r270 top (schematic designator D2)
D3_U1 "LED" WP_0805_LED 3.708,100.228 r90 top (schematic designator D3)
D3_U2 "LED" WP_0805_LED 258.547,121.742 r270 top (schematic designator D3)
D5_U1 "1N5822" WP_SMA_DO214AC 38.456,80.645 r90 top (schematic designator D5)
D5_U2 "1N5822" WP_SMA_DO214AC 198.298,78.181 r90 top (schematic designator D5)
D6_U1 "STTH112U" WP_1812D 39.218,109.423 r270 top (schematic designator D6)
D6_U2 "STTH112U" WP_1812D 200,108.026 r270 top (schematic designator D6)
D7_U1 "STTH112U" WP_1812D 39.218,101.93 r270 top (schematic designator D7)
D7_U2 "STTH112U" WP_1812D 200.076,100.533 r270 top (schematic designator D7)
D8_U1 "LED" WP_0805_LED 95.148,67.742 r270 top (schematic designator D8)
D8_U2 "LED" WP_0805_LED 175.26,82.601 r0 top (schematic designator D8)
D9_U1 "1N5822" WP_SMA_DO214AC 26.137,81.128 r90 top (schematic designator D9)
D9_U2 "1N5822" WP_SMA_DO214AC 186.538,79.121 r90 top (schematic designator D9)
D10_U1 "1N5822" WP_SMA_DO214AC 60.833,80.721 r90 top (schematic designator D10)
D10_U2 "1N5822" WP_SMA_DO214AC 218.897,77.8 r90 top (schematic designator D10)
D11_U1 "STTH112U" WP_1812D 60.477,109.753 r270 top (schematic designator D11)
D11_U2 "STTH112U" WP_1812D 220.04,108.052 r270 top (schematic designator D11)
D12_U1 "STTH112U" WP_1812D 60.173,102.286 r270 top (schematic designator D12)
D12_U2 "STTH112U" WP_1812D 220.116,100.533 r270 top (schematic designator D12)
D13_U1 "LED" WP_0805_LED 99.593,59.766 r90 top (schematic designator D13)
D13_U2 "LED" WP_0805_LED 167.64,76.225 r0 top (schematic designator D13)
D14_U1 "1N5822" WP_SMA_DO214AC 47.676,80.62 r90 top (schematic designator D14)
D14_U2 "1N5822" WP_SMA_DO214AC 207.569,78.105 r90 top (schematic designator D14)
D15_U1 "1N5822" WP_SMA_DO214AC 81.204,79.858 r90 top (schematic designator D15)
D15_U2 "1N5822" WP_SMA_DO214AC 241.96,78.715 r90 top (schematic designator D15)
D16_U1 "STTH112U" WP_1812D 80.137,109.779 r270 top (schematic designator D16)
D16_U2 "STTH112U" WP_1812D 240.106,108.026 r270 top (schematic designator D16)
D17_U1 "STTH112U" WP_1812D 80.061,102.159 r270 top (schematic designator D17)
D17_U2 "STTH112U" WP_1812D 240.106,100.635 r270 top (schematic designator D17)
D18_U1 "1N5822" WP_SMA_DO214AC 69.698,80.061 r90 top (schematic designator D18)
D18_U2 "1N5822" WP_SMA_DO214AC 228.321,79.273 r90 top (schematic designator D18)
D19_U1 "LED" WP_0805_LED 111.277,116.459 r270 top (schematic designator D19)
D19_U2 "LED" WP_0805_LED 142.799,121.514 r180 top (schematic designator D19)
L1_U1 "10uH/2A" WP_LBS6*6 13.005,108.61 r90 top (schematic designator L1)
L1_U2 "10uH/2A" WP_LBS6*6 250.571,122.479 r180 top (schematic designator L1)
P1_U1 "Header 2" WP_SIP2 21.438,58.725 r270 top (schematic designator P1)
P1_U2 "Header 2" WP_SIP2 143.307,99.72 r270 top (schematic designator P1)
P2_U1 "Header 2" WP_LSIP2 18.186,129.819 r0 top (schematic designator P2)
P2_U2 "Header 2" WP_LSIP2 234.645,129.921 r0 top (schematic designator P2)
P3_U1 "H1515S-2W" DC12-12 93.294,87.96 r270 top (schematic designator P2)
P3_U2 "H1515S-2W" DC12-12 183.642,108.179 r270 top (schematic designator P2)
P4_U1 "Header 15X2A" WP_CRM222-030 44.374,128.047 r180 bottom locked (schematic designator P4)
P4_U2 "Header 15X2A" WP_CRM222-030 215.623,129.952 r0 bottom locked (schematic designator P4)
Q1_U1 "IPW65R019C7" WP_TO247P#1 96.012,53.518 r180 top locked
Q1_U2 "IPW65R019C7" WP_TO247P#1 153.035,70.256 r0 top
Q2_U1 "IPW65R019C7" WP_TO247P#2 25.12,74 r0 bottom locked
Q2_U2 "IPW65R019C7" WP_TO247P#2 185.141,72.898 r0 bottom locked
Q3_U1 "IPW65R019C7" WP_TO247P#2 35.865,49.962 r180 bottom
Q3_U2 "IPW65R019C7" WP_TO247P#2 195.921,48.83 r180 bottom locked
Q4_U1 "IPW65R019C7" WP_TO247P#2 46.101,73.99 r0 bottom locked
Q4_U2 "IPW65R019C7" WP_TO247P#2 206.146,72.822 r0 bottom locked
Q5_U1 "IPW65R019C7" WP_TO247P#2 60.858,49.936 r180 bottom locked
Q5_U2 "IPW65R019C7" WP_TO247P#2 220.921,48.83 r180 bottom locked
Q6_U1 "MMBT4401" WP_SOT23B 86.309,111.912 r270 top (schematic designator Q6)
Q6_U2 "MMBT4401" WP_SOT23B 219.812,114.579 r270 top (schematic designator Q6)
Q7_U1 "IPW65R019C7" WP_TO247P#2 67.158,73.965 r0 bottom locked
Q7_U2 "IPW65R019C7" WP_TO247P#2 227.152,72.771 r0 bottom locked
Q8_U1 "IPW65R019C7" WP_TO247P#2 77.927,49.936 r180 bottom locked
Q8_U2 "IPW65R019C7" WP_TO247P#2 237.921,48.83 r180 bottom locked
R1_U1 "10K/0.1%" WP_0805R 1.753,51.892 r0 top (schematic designator R1)
R1_U2 "10K/0.1%" WP_0805R 149.047,114.452 r270 top (schematic designator R1)
R2_U1 "1K/0.1%" WP_0805R 6.375,51.892 r0 top (schematic designator R2)
R2_U2 "1K/0.1%" WP_0805R 148.996,109.982 r270 top (schematic designator R2)
R3_U1 "3K/0.1%" WP_0805R 12.573,60.452 r270 top (schematic designator R3)
R3_U2 "3K/0.1%" WP_0805R 147.726,104.8 r180 top (schematic designator R3)
R4_U1 "3K/0.1%" WP_0805R 14.757,60.325 r0 top (schematic designator R4)
R4_U2 "3K/0.1%" WP_0805R 145.72,102.438 r180 top (schematic designator R4)
R5_U1 "1K/0.1%" WP_0805R 1.626,63.805 r0 top (schematic designator R5)
R5_U2 "1K/0.1%" WP_0805R 147.345,117.119 r180 top (schematic designator R5)
R6_U1 "1K/0.1%" WP_0805R 6.325,65.862 r270 top (schematic designator R6)
R6_U2 "1K/0.1%" WP_0805R 137.617,112.217 r270 top (schematic designator R6)
R7_U1 "620R/0.1%" WP_0805R 12.548,53.619 r90 top (schematic designator R7)
R7_U2 "620R/0.1%" WP_0805R 143.256,104.8 r180 top (schematic designator R7)
R8_U1 "10K" WP_0805R 19.939,114.097 r270 top (schematic designator R8)
R8_U2 "10K" WP_0805R 226.187,113.462 r90 top (schematic designator R8)
R9_U1 "2K/0.1%" WP_0805R 1.676,66.04 r0 top (schematic designator R9)
R9_U2 "2K/0.1%" WP_0805R 140.259,117.119 r0 top (schematic designator R9)
R10_U1 "100R/0.1%" WP_0805R 14.808,53.619 r90 top (schematic designator R10)
R10_U2 "100R/0.1%" WP_0805R 138.735,102.54 r90 top (schematic designator R10)
R11_U1 "0R" WP_0805R 17.043,56.007 r270 top (schematic designator R11)
R11_U2 "0R" WP_0805R 138.709,98.044 r90 top (schematic designator R11)
R12_U1 "10K/0.1%" WP_0805R 6.35,68.097 r90 top (schematic designator R12)
R12_U2 "10K/0.1%" WP_0805R 137.719,114.173 r90 top (schematic designator R12)
R13_U1 "2K" WP_0805R 107.493,127.508 r180 top (schematic designator R13)
R13_U2 "2K" WP_0805R 168.859,120.066 r90 top (schematic designator R13)
R14_U1 "10K" WP_0805R 111.379,124.079 r180 top (schematic designator R14)
R14_U2 "10K" WP_0805R 171.247,122.453 r270 top (schematic designator R14)
R15_U1 "10K" WP_0805R 88.417,59.004 r0 top (schematic designator R15)
R15_U2 "10K" WP_0805R 167.742,71.755 r90 top (schematic designator R15)
R16_U1 "3K" WP_0805R 1.422,102.718 r270 top (schematic designator R16)
R16_U2 "3K" WP_0805R 258.572,117.018 r270 top (schematic designator R16)
R17_U1 "30K" WP_0805R 8.001,123.977 r180 top (schematic designator R17)
R17_U2 "30K" WP_0805R 235.001,118.339 r270 top (schematic designator R17)
R18_U1 "0K" WP_0805R 88.417,61.392 r0 top (schematic designator R18)
R18_U2 "0K" WP_0805R 169.824,71.78 r0 top (schematic designator R18)
R19_U1 "51K" WP_0805R 3.607,107.391 r270 top (schematic designator R19)
R19_U2 "51K" WP_0805R 250.825,112.344 r0 top (schematic designator R19)
R20_U1 "2K" WP_0805R 5.893,105.105 r0 top (schematic designator R20)
R20_U2 "2K" WP_0805R 253.009,114.579 r90 top (schematic designator R20)
R21_U1 "0R" WP_JS2L 113.182,88.976 r270 top (schematic designator R21)
R21_U2 "0R" WP_JS2L 145.237,88.9 r270 top (schematic designator R21)
R22_U1 "10K" WP_0805R 1.93,112.141 r270 top (schematic designator R22)
R22_U2 "10K" WP_0805R 244.043,112.573 r180 top (schematic designator R22)
R23_U1 "2R" WP_0805R 39.472,90.399 r270 top (schematic designator R23)
R23_U2 "2R" WP_0805R 199.492,88.087 r270 top (schematic designator R23)
R24_U1 "100K" WP_0805R 3.607,124.003 r180 top (schematic designator R24)
R24_U2 "100K" WP_0805R 232.664,115.926 r90 top (schematic designator R24)
R25_U1 "36K" WP_0805R 4.242,112.141 r270 top (schematic designator R25)
R25_U2 "36K" WP_0805R 246.075,112.522 r0 top (schematic designator R25)
R26_U1 "2R" WP_0805R 37.236,90.373 r270 top (schematic designator R26)
R26_U2 "2R" WP_0805R 197.231,88.113 r270 top (schematic designator R26)
R27_U1 "2R" WP_0805R 35.56,85.293 r270 top (schematic designator R27)
R27_U2 "2R" WP_0805R 195.453,82.474 r270 top (schematic designator R27)
R28_U1 "10K" WP_0805R 100.559,119.558 r180 top (schematic designator R28)
R28_U2 "10K" WP_0805R 159.156,116.713 r0 top (schematic designator R28)
R29_U1 "5K1" WP_0805R 102.768,119.456 r0 top (schematic designator R29)
R29_U2 "5K1" WP_0805R 163.678,116.713 r0 top (schematic designator R29)
R30_U1 "10K" WP_0805R 35.712,80.67 r180 top (schematic designator R30)
R30_U2 "10K" WP_0805R 195.605,77.927 r180 top (schematic designator R30)
R31_U1 "3K" WP_0805R 31.521,111.328 r90 top (schematic designator R31)
R31_U2 "3K" WP_0805R 192.634,109.728 r90 top (schematic designator R31)
R32_U1 "2R" WP_0805R 26.035,90.373 r270 top (schematic designator R32)
R32_U2 "2R" WP_0805R 185.953,88.062 r270 top (schematic designator R32)
R33_U1 "3K" WP_0805R 28.931,111.404 r180 top (schematic designator R33)
R33_U2 "3K" WP_0805R 190.195,109.804 r90 top (schematic designator R33)
R34_U1 "10K" WP_0805R 93.751,62.179 r270 top (schematic designator R34)
R34_U2 "10K" WP_0805R 178.105,84.76 r90 top (schematic designator R34)
R35_U1 "2R" WP_0805R 23.368,90.373 r270 top (schematic designator R35)
R35_U2 "2R" WP_0805R 183.693,88.138 r270 top (schematic designator R35)
R36_U1 "2R" WP_0805R 23.241,85.75 r270 top (schematic designator R36)
R36_U2 "2R" WP_0805R 183.617,83.541 r270 top (schematic designator R36)
R37_U1 "10K" WP_0805R 21.057,81.128 r0 top (schematic designator R37)
R37_U2 "10K" WP_0805R 181.407,78.943 r0 top (schematic designator R37)
R38_U1 "750R" WP_0805R 103.911,91.135 r270 top (schematic designator R38)
R38_U2 "750R" WP_0805R 175.311,98.933 r180 top (schematic designator R38)
R39_U1 "2R" WP_0805R 60.757,90.5 r270 top (schematic designator R39)
R39_U2 "2R" WP_0805R 220.37,88.24 r270 top (schematic designator R39)
R40_U1 "10R" WP_0805R 101.879,62.332 r270 top (schematic designator R40)
R40_U2 "10R" WP_0805R 167.792,80.848 r270 top (schematic designator R40)
R41_U1 "2R" WP_0805R 58.318,90.526 r270 top (schematic designator R41)
R41_U2 "2R" WP_0805R 218.11,88.189 r270 top (schematic designator R41)
R42_U1 "2R" WP_0805R 57.963,85.395 r270 top (schematic designator R42)
R42_U2 "2R" WP_0805R 215.951,82.093 r270 top (schematic designator R42)
R43_U1 "10K" WP_0805R 91.694,119.38 r180 top (schematic designator R43)
R43_U2 "10K" WP_0805R 174.498,121.59 r270 top (schematic designator R43)
R44_U1 "5K1" WP_0805R 86.893,119.304 r180 top (schematic designator R44)
R44_U2 "5K1" WP_0805R 176.708,117.018 r180 top (schematic designator R44)
R45_U1 "750R" WP_0805R 101.295,91.161 r270 top (schematic designator R45)
R45_U2 "750R" WP_0805R 170.358,101.168 r270 top (schematic designator R45)
R46_U1 "10K" WP_0805R 97.282,59.868 r90 top (schematic designator R46)
R46_U2 "10K" WP_0805R 172.212,74.016 r180 top (schematic designator R46)
R47_U1 "10K" WP_0805R 55.677,80.797 r0 top (schematic designator R47)
R47_U2 "10K" WP_0805R 213.665,77.521 r0 top (schematic designator R47)
R48_U1 "3K" WP_0805R 52.857,110.693 r90 top (schematic designator R48)
R48_U2 "3K" WP_0805R 211.811,109.271 r90 top (schematic designator R48)
R49_U1 "2R" WP_0805R 47.193,90.246 r270 top (schematic designator R49)
R49_U2 "2R" WP_0805R 207.01,88.189 r270 top (schematic designator R49)
R50_U1 "3K" WP_0805R 50.622,110.642 r90 top (schematic designator R50)
R50_U2 "3K" WP_0805R 209.55,109.271 r90 top (schematic designator R50)
R51_U1 "2K" WP_0805R 86.36,105.893 r180 top (schematic designator R51)
R51_U2 "2K" WP_0805R 223.749,113.462 r90 top (schematic designator R51)
R52_U1 "2R" WP_0805R 44.882,90.297 r270 top (schematic designator R52)
R52_U2 "2R" WP_0805R 204.724,88.189 r270 top (schematic designator R52)
R53_U1 "2R" WP_0805R 44.679,85.166 r270 top (schematic designator R53)
R53_U2 "2R" WP_0805R 204.724,82.906 r270 top (schematic designator R53)
R54_U1 "10K" WP_0805R 42.57,80.467 r0 top (schematic designator R54)
R54_U2 "10K" WP_0805R 202.387,78.181 r0 top (schematic designator R54)
R55_U1 "3K" WP_0805R 84.15,110.236 r90 top (schematic designator R55)
R55_U2 "3K" WP_0805R 220.269,117.653 r180 top (schematic designator R55)
R56_U1 "10K" WP_0805R 85.954,126.492 r180 top (schematic designator R56)
R56_U2 "10K" WP_0805R 187.325,116.992 r0 top (schematic designator R56)
R57_U1 "5K1" WP_0805R 84.201,124.206 r180 top (schematic designator R57)
R57_U2 "5K1" WP_0805R 189.636,119.304 r90 top (schematic designator R57)
R58_U1 "3K" WP_0805R 86.36,108.153 r180 top (schematic designator R58)
R58_U2 "3K" WP_0805R 215.113,114.427 r0 top (schematic designator R58)
R59_U1 "2R" WP_0805R 81.432,90.5 r270 top (schematic designator R59)
R59_U2 "2R" WP_0805R 241.884,88.24 r270 top (schematic designator R59)
R60_U1 "2R" WP_0805R 79.197,90.449 r270 top (schematic designator R60)
R60_U2 "2R" WP_0805R 239.42,88.214 r270 top (schematic designator R60)
R61_U1 "2R" WP_0805R 78.283,84.684 r270 top (schematic designator R61)
R61_U2 "2R" WP_0805R 239.116,83.363 r270 top (schematic designator R61)
R62_U1 "10K" WP_0805R 76.073,80.035 r0 top (schematic designator R62)
R62_U2 "10K" WP_0805R 236.779,78.689 r0 top (schematic designator R62)
R63_U1 "3K" WP_0805R 72.161,110.744 r90 top (schematic designator R63)
R63_U2 "3K" WP_0805R 231.724,109.449 r90 top (schematic designator R63)
R64_U1 "2R" WP_0805R 68.783,90.145 r270 top (schematic designator R64)
R64_U2 "2R" WP_0805R 227.813,88.57 r270 top (schematic designator R64)
R65_U1 "3K" WP_0805R 69.901,110.846 r180 top (schematic designator R65)
R65_U2 "3K" WP_0805R 229.514,109.449 r90 top (schematic designator R65)
R66_U1 "2R" WP_0805R 66.446,90.17 r270 top (schematic designator R66)
R66_U2 "2R" WP_0805R 225.298,88.468 r270 top (schematic designator R66)
R67_U1 "2R" WP_0805R 66.396,85.623 r270 top (schematic designator R67)
R67_U2 "2R" WP_0805R 225.12,83.541 r270 top (schematic designator R67)
R68_U1 "10K" WP_0805R 64.643,80.569 r0 top (schematic designator R68)
R68_U2 "10K" WP_0805R 222.936,78.943 r0 top (schematic designator R68)
R69_U1 "10K" WP_0805R 103.581,110.82 r270 top (schematic designator R69)
R69_U2 "10K" WP_0805R 250.292,104.623 r270 top (schematic designator R69)
R70_U1 "5K1" WP_0805R 101.397,108.433 r180 top (schematic designator R70)
R70_U2 "5K1" WP_0805R 250.241,100.228 r270 top (schematic designator R70)
R71_U1 "3K" WP_0805R 108.915,111.582 r0 top (schematic designator R71)
R71_U2 "3K" WP_0805R 137.82,118.796 r90 top (schematic designator R71)
R72_U1 "20K" WP_0805R 76.479,122.123 r0 top (schematic designator R72)
R72_U2 "20K" WP_0805R 249.301,94.945 r0 top (schematic designator R72)
R73_U1 "10K" WP_0805R 72.161,122.123 r0 top (schematic designator R73)
R73_U2 "10K" WP_0805R 251.612,92.202 r180 top (schematic designator R73)
R74_U1 "100K" WP_0805R 26.238,63.906 r0 top (schematic designator R74)
R74_U2 "100K" WP_0805R 237.998,61.595 r180 top (schematic designator R74)
R75_U1 "100K" WP_0805R 19.101,65.964 r90 top (schematic designator R75)
R75_U2 "100K" WP_0805R 242.773,70.612 r270 top (schematic designator R75)
R76_U1 "100K" WP_0805R 21.488,65.964 r90 top (schematic designator R76)
R76_U2 "100K" WP_0805R 242.697,63.779 r90 top (schematic designator R76)
R77_U1 "100K" WP_0805R 26.238,68.428 r270 top (schematic designator R77)
R77_U2 "100K" WP_0805R 237.871,66.167 r270 top (schematic designator R77)
R78_U1 "5K1/1%" WP_0805R 19.05,72.746 r0 top (schematic designator R78)
R78_U2 "5K1/1%" WP_0805R 251.993,75.209 r0 top (schematic designator R78)
R79_U1 "100K" WP_0805R 16.815,70.434 r90 top (schematic designator R79)
R79_U2 "100K" WP_0805R 247.371,72.771 r0 top (schematic designator R79)
R80_U1 "100K" WP_0805R 16.789,68.351 r270 top (schematic designator R80)
R80_U2 "100K" WP_0805R 245.186,72.796 r180 top (schematic designator R80)
R81_U1 "100K" WP_0805R 23.8,63.779 r180 top (schematic designator R81)
R81_U2 "100K" WP_0805R 240.259,61.57 r0 top (schematic designator R81)
R82_U1 "100K" WP_0805R 23.8,65.989 r90 top (schematic designator R82)
R82_U2 "100K" WP_0805R 240.284,63.779 r90 top (schematic designator R82)
R83_U1 "20K" WP_0805R 76.53,119.507 r0 top (schematic designator R83)
R83_U2 "20K" WP_0805R 253.848,94.92 r0 top (schematic designator R83)
R84_U1 "10K" WP_0805R 72.161,119.507 r0 top (schematic designator R84)
R84_U2 "10K" WP_0805R 254.025,92.177 r0 top (schematic designator R84)
R85_U1 "200R" WP_0805R 68.682,119.532 r180 top (schematic designator R85)
R85_U2 "200R" WP_0805R 191.872,118.847 r0 top (schematic designator R85)
R86_U1 "200R" WP_0805R 68.656,122.199 r180 top (schematic designator R86)
R86_U2 "200R" WP_0805R 191.872,116.611 r0 top (schematic designator R86)
T1_U1 "ACM7060-102" WP_ACM7060 93.396,92.202 r90 top (schematic designator T1)
T1_U2 "ACM7060-102" WP_ACM7060 170.307,105.283 r180 top (schematic designator T1)
U1_U1 "MCP604T-I/SL" WP_SOIC14 1.245,55.804 r90 top (schematic designator U1)
U1_U2 "MCP604T-I/SL" WP_SOIC14 141.503,115.646 r0 top (schematic designator U1)
U2_U1 "AS1117-2V5" WP_SOT223 12.065,44.806 r180 top (schematic designator U2)
U2_U2 "AS1117-2V5" WP_SOT223 129.794,105.664 r90 top (schematic designator U2)
U3_U1 "TPS54531DDAR" WP_SOIC8P 9.017,121.133 r270 top (schematic designator U3)
U3_U2 "TPS54531DDAR" WP_SOIC8P 237.338,118.516 r0 top (schematic designator U3)
U4_U1 "OPA2188AIDR" WP_SOIC8 101.981,126.086 r0 top (schematic designator U4)
U4_U2 "OPA2188AIDR" WP_SOIC8 161.62,123.292 r0 top (schematic designator U4)
U5_U1 "ACS712ELCTR-20B-T" WP_SOIC8 80.899,56.439 r180 top (schematic designator U5)
U5_U2 "ACS712ELCTR-20B-T" WP_SOIC8 166.218,61.087 r0 top (schematic designator U5)
U6_U1 "IR2213S" WP_SOIC16L 26.772,97.942 r90 top (schematic designator U6)
U6_U2 "IR2213S" WP_SOIC16L 187.655,96.52 r90 top (schematic designator U6)
U7_U1 "ACS712ELCTR-20B-T" WP_SOIC8 34.29,45.847 r0 top (schematic designator U7)
U7_U2 "ACS712ELCTR-20B-T" WP_SOIC8 192.227,44.755 r0 top (schematic designator U7)
U8_U1 "OPA2188AIDR" WP_SOIC8 92.634,121.006 r180 top (schematic designator U8)
U8_U2 "OPA2188AIDR" WP_SOIC8 180.391,123.571 r0 top (schematic designator U8)
U9_U1 "IR2213S" WP_SOIC16L 47.777,97.942 r90 top (schematic designator U9)
U9_U2 "IR2213S" WP_SOIC16L 207.239,96.52 r90 top (schematic designator U9)
U10_U1 "ACS712ELCTR-20B-T" WP_SOIC8 59.588,45.822 r0 top (schematic designator U10)
U10_U2 "ACS712ELCTR-20B-T" WP_SOIC8 216.941,44.679 r0 top (schematic designator U10)
U11_U1 "IR2213S" WP_SOIC16L 67.488,97.968 r90 top (schematic designator U11)
U11_U2 "IR2213S" WP_SOIC16L 227.508,96.495 r90 top (schematic designator U11)
U12_U1 "ACS712ELCTR-20B-T" WP_SOIC8 76.098,45.72 r0 top (schematic designator U12)
U12_U2 "ACS712ELCTR-20B-T" WP_SOIC8 234.239,44.679 r0 top (schematic designator U12)
U13_U1 "OPA2188AIDR" WP_SOIC8 98.577,112.065 r180 top (schematic designator U13)
U13_U2 "OPA2188AIDR" WP_SOIC8 257.226,102.489 r270 top (schematic designator U13)
U14_U1 "ACPL-C87B-500E" WP_SOIC8L 15.24,88.163 r90 top (schematic designator U14)
U14_U2 "ACPL-C87B-500E" WP_SOIC8L 251.79,78.08 r90 top (schematic designator U14)
U15 "LRM5-A60H12RB-T2" WP_LRM5-A60H12RB-T2 101,-2.997 r0 top locked
U16_U1 "TLP127" WP_SOP4 64.237,119.659 r180 top (schematic designator U16)
U16_U2 "TLP127" WP_SOP4 196.571,119.101 r0 top (schematic designator U16)
U17_U1 "TLP358H" WP_SOP8 106.451,85.319 r270 top (schematic designator U17)
U17_U2 "TLP358H" WP_SOP8 175.641,95.682 r270 top (schematic designator U17)
V1_U1 "BAV99" WP_SOT23B 18.39,83.896 r180 top (schematic designator V1)
V1_U2 "BAV99" WP_SOT23B 258.318,73.076 r90 top (schematic designator V1)

## Footprints (in the part's own frame and the unit in brackets; to place one, negate y for a bottom-side part, rotate by r counter-clockwise, add the part's x,y. Pads: shape width x height; smd on the part's side, far side on the other; paste and mask are expansions set on the pad)
DC12-12 [mil]
  round 60 hole 30: 1(0,0) 2(100,0) 3(400,0) 4(600,0)
  silkscreen extent -85,-250 695,120
MKP3D-450V-140UF-1 [mm]
  round 6 hole 3.2: 0(3,49) 0(10,-4) 0(81,-4) 0(87,49)
  oval 5x4 hole 2: 1(6,6) 1(46,39) 2(55,39) 2(60,6)
  silkscreen extent 0,-7 90,52
WP_0805_LED [mil]
  rect 50x50 smd: 1(0,0) 2(91,0)
  silkscreen extent -33,-37 138,36
WP_0805C [mil]
  rect 39.37x50 smd: 1(1,-1) 2(95,-1)
  silkscreen extent -30,-38 125,35
WP_0805R [mm]
  rect 1x1.27 smd: 1(0,0) 2(2.388,0)
  silkscreen extent -0.79,-0.94 3.17,0.91
WP_1206CC [mil]
  rect 52.13x60 smd: 1(0,0) 2(135,0)
  silkscreen extent -36,-43 171,42
WP_1210CC [mil]
  rect 60x100 smd: 1(0,0) 2(135,0)
  silkscreen extent -44,-63 179,63
WP_1812 [mm]
  rect 2x3.175 smd: 1(-0.152,0) 2(4.343,0)
  silkscreen extent -1.52,-2.16 5.71,2.16
WP_1812D [mil]
  rect 60x125 smd: 1(0,0) 2(185,0)
  silkscreen extent -46,-85 232,85
WP_ACM7060 [mm]
  rect 2x1.5 smd: 1(0,0.051) 2(7,0.051) 3(0.025,-2.949) 4(7,-2.949)
  silkscreen extent -0.99,-4.42 8,1.52
WP_CRM222-030 [mil]
  oval 40x60 hole 30: 1(0,0) 2(-75,0) 3(-150,0) 4(-225,0) 5(-300,0) 6(-375,0) 7(-450,0) 8(-525,0) 9(-600,0) 10(-675,0) 11(-750,0) 12(-825,0) 13(-900,0) 14(-975,0) 15(-1050,0) 16(-37.48,75) 17(-112.48,75) 18(-187.48,75) 19(-262.48,75) 20(-337.48,75) 21(-412.48,75) 22(-487.48,75) 23(-562.48,75) 24(-637.48,75) 25(-712.48,75) 26(-787.48,75) 27(-862.48,75) 28(-937.48,75) 29(-1012.48,75) 30(-1087.48,75)
  round 106.3 hole 106.3: ""(-1402.48,37.5) ""(314.04,37.5)
  silkscreen extent -1489,-63 401,138
WP_JS2L [mm]
  rect 3x5 smd: 1(-0.102,-0.025) 2(3.581,-0.025)
  silkscreen extent -1.78,-2.69 5.26,2.64
WP_LBS6*6 [mm]
  rect 2x3.5 smd: 1(0,0) 2(5.5,0)
  silkscreen extent -1.19,-3 6.71,3
WP_LRM5-A60H12RB-T2 [mm]
  oval 2.8x3.5 hole 2.3: 1(32.7,7.66) 2(37.9,7.66) 3(43.1,7.66) 4(48.3,7.66) 5(53.5,7.66) 6(58.7,7.66) 7(32.7,2.16) 8(37.9,2.16) 9(43.1,2.16) 10(48.3,2.16) 11(53.5,2.16) 12(58.7,2.16)
  oval 0.9x1.016 hole 0.6: A1(5.7,-3.63) A2(7.7,-3.63) A3(9.7,-3.63) A4(11.7,-3.63) A5(13.7,-3.63) A6(15.7,-3.63) A7(17.7,-3.63) A8(19.7,-3.63) A9(21.7,-3.63) A10(23.7,-3.63) A11(25.7,-3.63) A12(27.7,-3.63) B1(5.7,-1.63) B2(7.7,-1.63) B3(9.7,-1.63) B4(11.7,-1.63) B5(13.7,-1.63) B6(15.7,-1.63) B7(17.7,-1.63) B8(19.7,-1.63) B9(21.7,-1.63) B10(23.7,-1.63) B11(25.7,-1.63) B12(27.7,-1.63) C1(5.7,0.37) C2(7.7,0.37) C3(9.7,0.37) C4(11.7,0.37) C5(13.7,0.37) C6(15.7,0.37) C7(17.7,0.37) C8(19.7,0.37) C9(21.7,0.37) C10(23.7,0.37) C11(25.7,0.37) C12(27.7,0.37) D1(5.7,2.37) D2(7.7,2.37) D3(9.7,2.37) D4(11.7,2.37) D5(13.7,2.37) D6(15.7,2.37) D7(17.7,2.37) D8(19.7,2.37) D9(21.7,2.37) D10(23.7,2.37) D11(25.7,2.37) D12(27.7,2.37) E1(5.7,4.37) E2(7.7,4.37) E3(9.7,4.37) E4(11.7,4.37) E5(13.7,4.37) E6(15.7,4.37) E7(17.7,4.37) E8(19.7,4.37) E9(21.7,4.37) E10(23.7,4.37) E11(25.7,4.37) E12(27.7,4.37)
  round 5 hole 2.7: ""(0,0) ""(65.4,0)
  silkscreen extent -3.68,-20 69.12,11.43
WP_LSIP2 [mil]
  rect 100x100 hole 60: 1(0,0)
  round 100 hole 60: 2(150,0)
  silkscreen extent -106,-136 252,142
WP_SIP2 [mil]
  rect 70x70 hole 40: 1(0,0)
  round 70 hole 40: 2(100,0)
  silkscreen extent -50,-120 160,100
WP_SMA_DO214AC [mm]
  rect 2.35x1.55 smd: 1(0,0) 2(4.3,0)
  silkscreen extent -0.65,-1.5 5.73,1.5, body extent -0.45,-1.3 4.75,1.3, height 2.64
WP_SOIC8 [mm]
  oval 1.5x0.5 smd: 1(-1.473,-0.66) 2(-1.473,-1.93) 3(-1.473,-3.2) 4(-1.473,-4.47) 5(4.674,-4.47) 6(4.674,-3.2) 7(4.674,-1.93) 8(4.674,-0.66)
  silkscreen extent -0.03,-5.08 3.23,0.03
WP_SOIC8L [mm]
  oval 2x0.6 smd: 1(0,0) 2(0,-1.27) 3(0,-2.54) 4(0,-3.81) 5(11.506,-3.81) 6(11.506,-2.54) 7(11.506,-1.27) 8(11.506,0)
  silkscreen extent 1.45,-4.42 10.06,0.69
WP_SOIC8P [mil]
  oval 59.06x19.68 smd: 1(-2,1) 2(-2,-49) 3(-2,-99) 4(-2,-149) 5(240,-149) 6(240,-99) 7(240,-49) 8(240,1)
  rect 100x120 smd: 9(119,-73)
  silkscreen extent 55,-173 183,28
WP_SOIC14 [mm]
  oval 1.5x0.5 smd: 1(-1.219,-0.889) 2(-1.219,-2.159) 3(-1.219,-3.429) 4(-1.219,-4.699) 5(-1.219,-5.969) 6(-1.219,-7.239) 7(-1.219,-8.509) 8(4.953,-8.484) 9(4.928,-7.214) 10(4.928,-5.994) 11(4.928,-4.674) 12(4.928,-3.404) 13(4.928,-2.159) 14(4.928,-0.864)
  silkscreen extent 0.03,-9.12 3.68,0.05
WP_SOIC16L [mm]
  rect 2x0.4 smd: 1(0,0)
  oval 2x0.4 smd: 2(0,-1.27) 3(0,-2.54) 4(0,-3.81) 5(0,-5.08) 6(0,-6.35) 7(0,-7.62) 8(0,-8.89) 9(10.65,-8.89) 10(10.65,-7.62) 11(10.65,-6.35) 12(10.65,-5.08) 13(10.65,-3.81) 14(10.65,-2.54) 15(10.65,-1.27) 16(10.65,0)
  silkscreen extent 1.84,-9.53 8.81,0.64
WP_SOP4 [mil]
  rect 80x30 smd: 1(11,1)
  oval 80x30 smd: 3(11,-99) 4(293,-99) 6(293,1)
  silkscreen extent 63,-140 241,51
WP_SOP8 [mil]
  rect 100x50 smd: 1(0,0)
  oval 100x50 smd: 2(0,-100) 3(0,-200) 4(0,-300) 5(403,-300) 6(403,-200) 7(403,-100) 8(403,0)
  silkscreen extent 104,-350 305,50
WP_SOT23B [mil]
  rect 30x40 smd: 1(0,0) 2(74,0) 3(37,76)
  silkscreen extent -19,-24 93,100
WP_SOT223 [mm]
  rect 1x1.8 smd: 1(0.864,-4.47) 2(3.175,-4.47) 3(5.436,-4.496)
  rect 4x2.4 smd: 4(3.15,1.473)
  silkscreen extent 0,-3.35 6.27,0
WP_TO247P#1 [mm]
  rect 2x3.5 hole 1.8: 1(0,0)
  oval 2x3.5 hole 1.8: 2(5.44,0) 3(10.88,0)
  round 4 hole 2.2: ""(5.465,20)
  silkscreen extent -2.54,-2.74 13.41,25.91
WP_TO247P#2 [mm]
  rect 2x3.5 hole 1.8: 1(0,0)
  oval 2x3.5 hole 1.8: 2(5.44,0) 3(10.88,0)
  round 4 hole 2.2: ""(5.465,-20)
  silkscreen extent -2.54,-25.91 13.41,2.74

## Part data
C1_U1 C1_U2 C2_U1 C2_U2: library part ELECTRO1, "Electrolytic Capacitor"
C3_U1 C3_U2 C4_U1 C4_U2 C12_U1 C12_U2 C14_U1 C14_U2 C19_U1 C19_U2 C31_U1 C31_U2 C32_U1 C32_U2 C33_U1 C33_U2 C42_U1 C42_U2 C43_U1 C43_U2 C44_U1 C44_U2 C45_U1 C45_U2 C46_U1 C46_U2 C48_U1 C48_U2 C50_U1 C50_U2 C51_U1 C51_U2 C52_U1 C52_U2 C53_U1 C53_U2 C61_U1 C61_U2 C64_U1 C64_U2 C67_U1 C67_U2 C68_U1 C68_U2: library part CAP, "Capacitor"
C4: library part "Cap Pol1", "Polarized Capacitor (Radial)"
C5_U1 C5_U2 C6_U1 C6_U2 C24_U1 C24_U2 C34_U1 C34_U2 C35_U1 C35_U2 C36_U1 C36_U2 C37_U1 C37_U2 C38_U1 C38_U2 C39_U1 C39_U2 C40_U1 C40_U2 C41_U1 C41_U2 C49_U1 C49_U2 C55_U1 C55_U2 C56_U1 C56_U2 C57_U1 C57_U2 C66_U1 C66_U2: library part Cap2, "Capacitor"
C7_U1 C7_U2 C8_U1 C8_U2 C9_U1 C9_U2 C10_U1 C10_U2 C11_U1 C11_U2 C13_U1 C13_U2 C15_U1 C15_U2 C16_U1 C16_U2 C17 C18 C20_U1 C20_U2 C23_U1 C23_U2 C25_U1 C25_U2 C29_U1 C29_U2 C30_U1 C30_U2 C58_U1 C58_U2 C59_U1 C59_U2 C60_U1 C60_U2 C69_U1 C69_U2 C70_U1 C70_U2 C71_U1 C71_U2 C72_U1 C72_U2 C73 C74 C75 C76 C77_U1 C77_U2 C78_U1 C78_U2: library part "Cap Semi", "Capacitor (Semiconductor SIM Model)"
C21_U1 C21_U2 C22_U1 C22_U2 C65_U1 C65_U2: library part CAP1
C26_U1 C26_U2 C27_U1 C27_U2 C28_U1 C28_U2: library part Cap, "Capacitor"
C47_U1 C47_U2 C54_U1 C54_U2: "Capacitor (Semiconductor SIM Model)"
C62_U1 C62_U2 C63_U1 C63_U2: library part CAP
D1_U1 D1_U2: library part LED2
D2_U1 D2_U2 D5_U1 D5_U2 D9_U1 D9_U2 D10_U1 D10_U2 D14_U1 D14_U2 D15_U1 D15_U2 D18_U1 D18_U2: library part "DIODE SCHOTTKY", "Schottky Diode"
D3_U1 D3_U2 D8_U1 D8_U2 D13_U1 D13_U2 D19_U1 D19_U2: library part LED0, "Typical INFRARED GaAs LED"
D6_U1 D6_U2 D7_U1 D7_U2 D11_U1 D11_U2 D12_U1 D12_U2 D16_U1 D16_U2 D17_U1 D17_U2: library part Diode, "Default Diode"
L1_U1 L1_U2: library part Inductor, "Inductor"
P1_U1 P1_U2 P2_U1 P2_U2: "Header, 2-Pin"
P3_U1 P3_U2: library part DC12-12
P4_U1 P4_U2: "Header, 15-Pin, Dual row"
Q1_U1 Q1_U2 Q2_U1 Q2_U2 Q3_U1 Q3_U2 Q4_U1 Q4_U2 Q5_U1 Q5_U2 Q7_U1 Q7_U2 Q8_U1 Q8_U2: library part 7N60
R1_U1 R1_U2 R2_U1 R2_U2 R3_U1 R3_U2 R4_U1 R4_U2 R5_U1 R5_U2 R6_U1 R6_U2 R7_U1 R7_U2 R8_U1 R8_U2 R9_U1 R9_U2 R10_U1 R10_U2 R11_U1 R11_U2 R12_U1 R12_U2 R13_U1 R13_U2 R14_U1 R14_U2 R15_U1 R15_U2 R18_U1 R18_U2 R21_U1 R21_U2 R23_U1 R23_U2 R26_U1 R26_U2 R27_U1 R27_U2 R28_U1 R28_U2 R29_U1 R29_U2 R30_U1 R30_U2 R32_U1 R32_U2 R35_U1 R35_U2 R36_U1 R36_U2 R37_U1 R37_U2 R39_U1 R39_U2 R40_U1 R40_U2 R41_U1 R41_U2 R42_U1 R42_U2 R43_U1 R43_U2 R44_U1 R44_U2 R47_U1 R47_U2 R49_U1 R49_U2 R52_U1 R52_U2 R53_U1 R53_U2 R54_U1 R54_U2 R56_U1 R56_U2 R57_U1 R57_U2 R59_U1 R59_U2 R60_U1 R60_U2 R61_U1 R61_U2 R62_U1 R62_U2 R64_U1 R64_U2 R66_U1 R66_U2 R67_U1 R67_U2 R68_U1 R68_U2 R69_U1 R69_U2 R70_U1 R70_U2 R72_U1 R72_U2 R73_U1 R73_U2 R74_U1 R74_U2 R75_U1 R75_U2 R76_U1 R76_U2 R77_U1 R77_U2 R78_U1 R78_U2 R79_U1 R79_U2 R80_U1 R80_U2 R81_U1 R81_U2 R82_U1 R82_U2 R83_U1 R83_U2 R84_U1 R84_U2: library part Res2, "Resistor"
R16_U1 R16_U2 R17_U1 R17_U2 R19_U1 R19_U2 R20_U1 R20_U2 R22_U1 R22_U2 R24_U1 R24_U2 R25_U1 R25_U2 R31_U1 R31_U2 R33_U1 R33_U2 R34_U1 R34_U2 R46_U1 R46_U2 R48_U1 R48_U2 R50_U1 R50_U2 R51_U1 R51_U2 R55_U1 R55_U2 R58_U1 R58_U2 R63_U1 R63_U2 R65_U1 R65_U2 R71_U1 R71_U2 R85_U1 R85_U2 R86_U1 R86_U2: library part RES
R38_U1 R38_U2 R45_U1 R45_U2: library part WP_RES
T1_U1 T1_U2: library part Trans, "Transformer"
U1_U1 U1_U2: library part TL084D, "JFET-Input Operational Amplifier"
U2_U1 U2_U2: library part AS1117
U4_U1 U4_U2 U8_U1 U8_U2 U13_U1 U13_U2: library part LT1358, "Fast Settling Dual Operational Amplifier"
U5_U1 U5_U2 U7_U1 U7_U2 U10_U1 U10_U2 U12_U1 U12_U2: library part ACS711
U15: library part MULTI_HEADER
U16_U1 U16_U2: library part TLP521-1
U17_U1 U17_U2: library part TLP358